# Altium PCB MEMS_Instrumentation.PcbDoc
Units mil, origin at the board's own origin, x right, y up, seen from the top; angles counter-clockwise.
Board outline 3759.84 x 2874.02 mil, 6 copper layers (Top Layer, GND, VCC+, VCC-, VExcite, Bottom Layer); 115 components, 110 nets, 526 pads, 54 vias.
Unrouted connection lines stored in the file: 6.
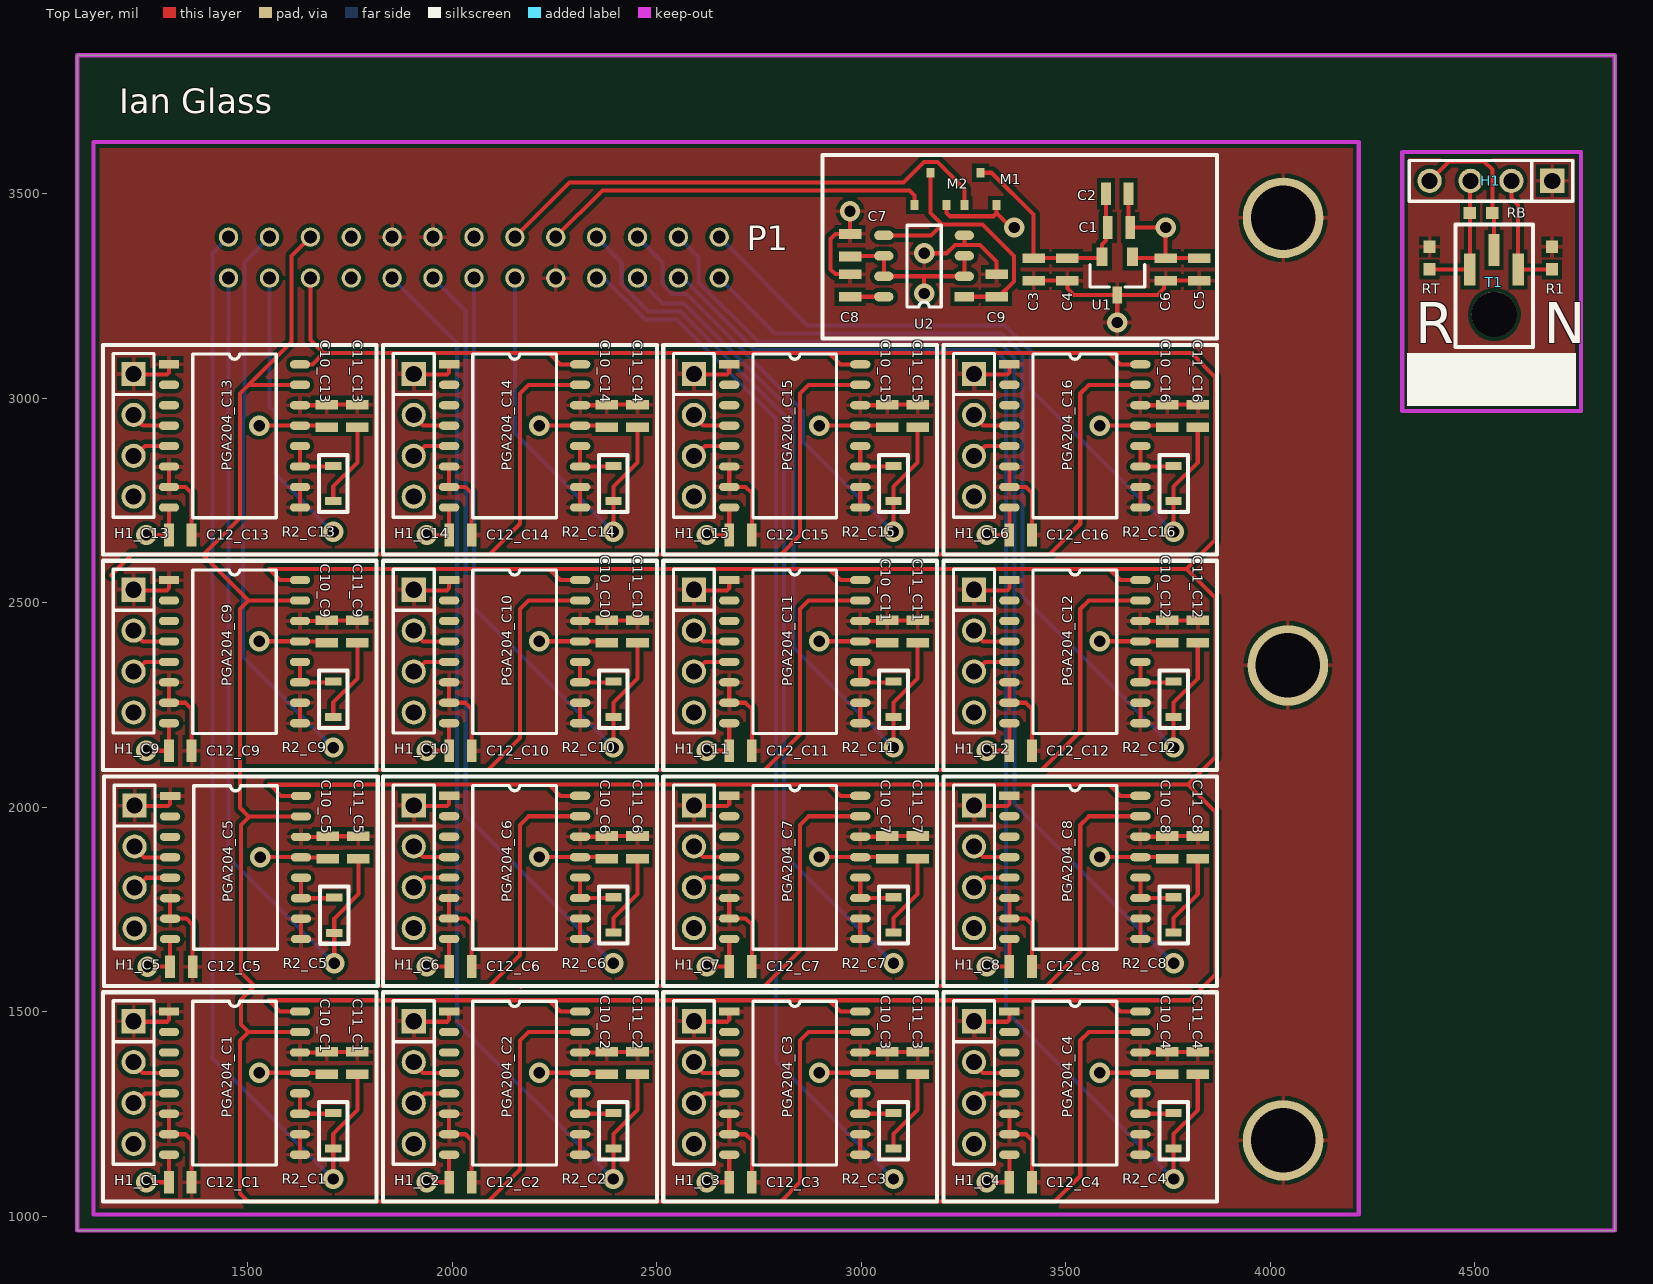
[diagram p0: Top Layer view]
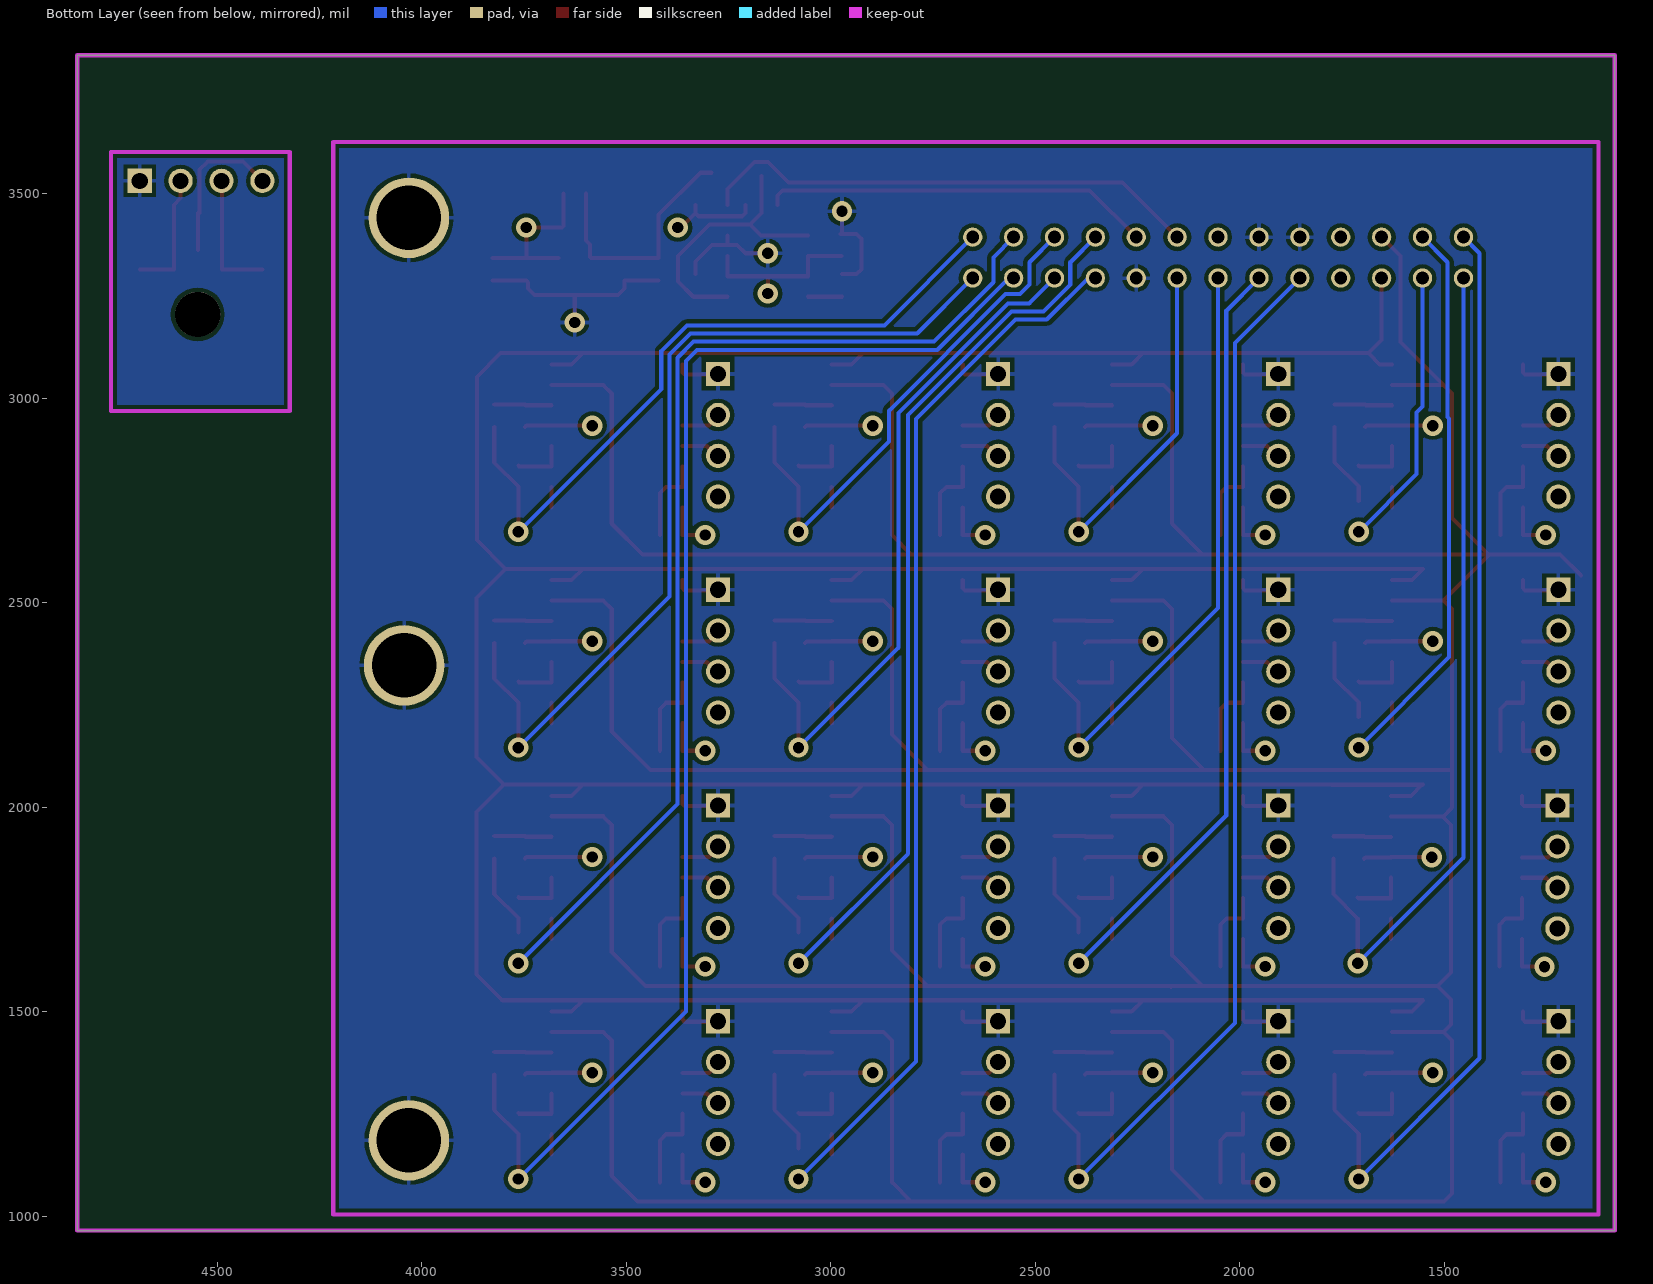
[diagram p1: Bottom Layer view, seen from below]
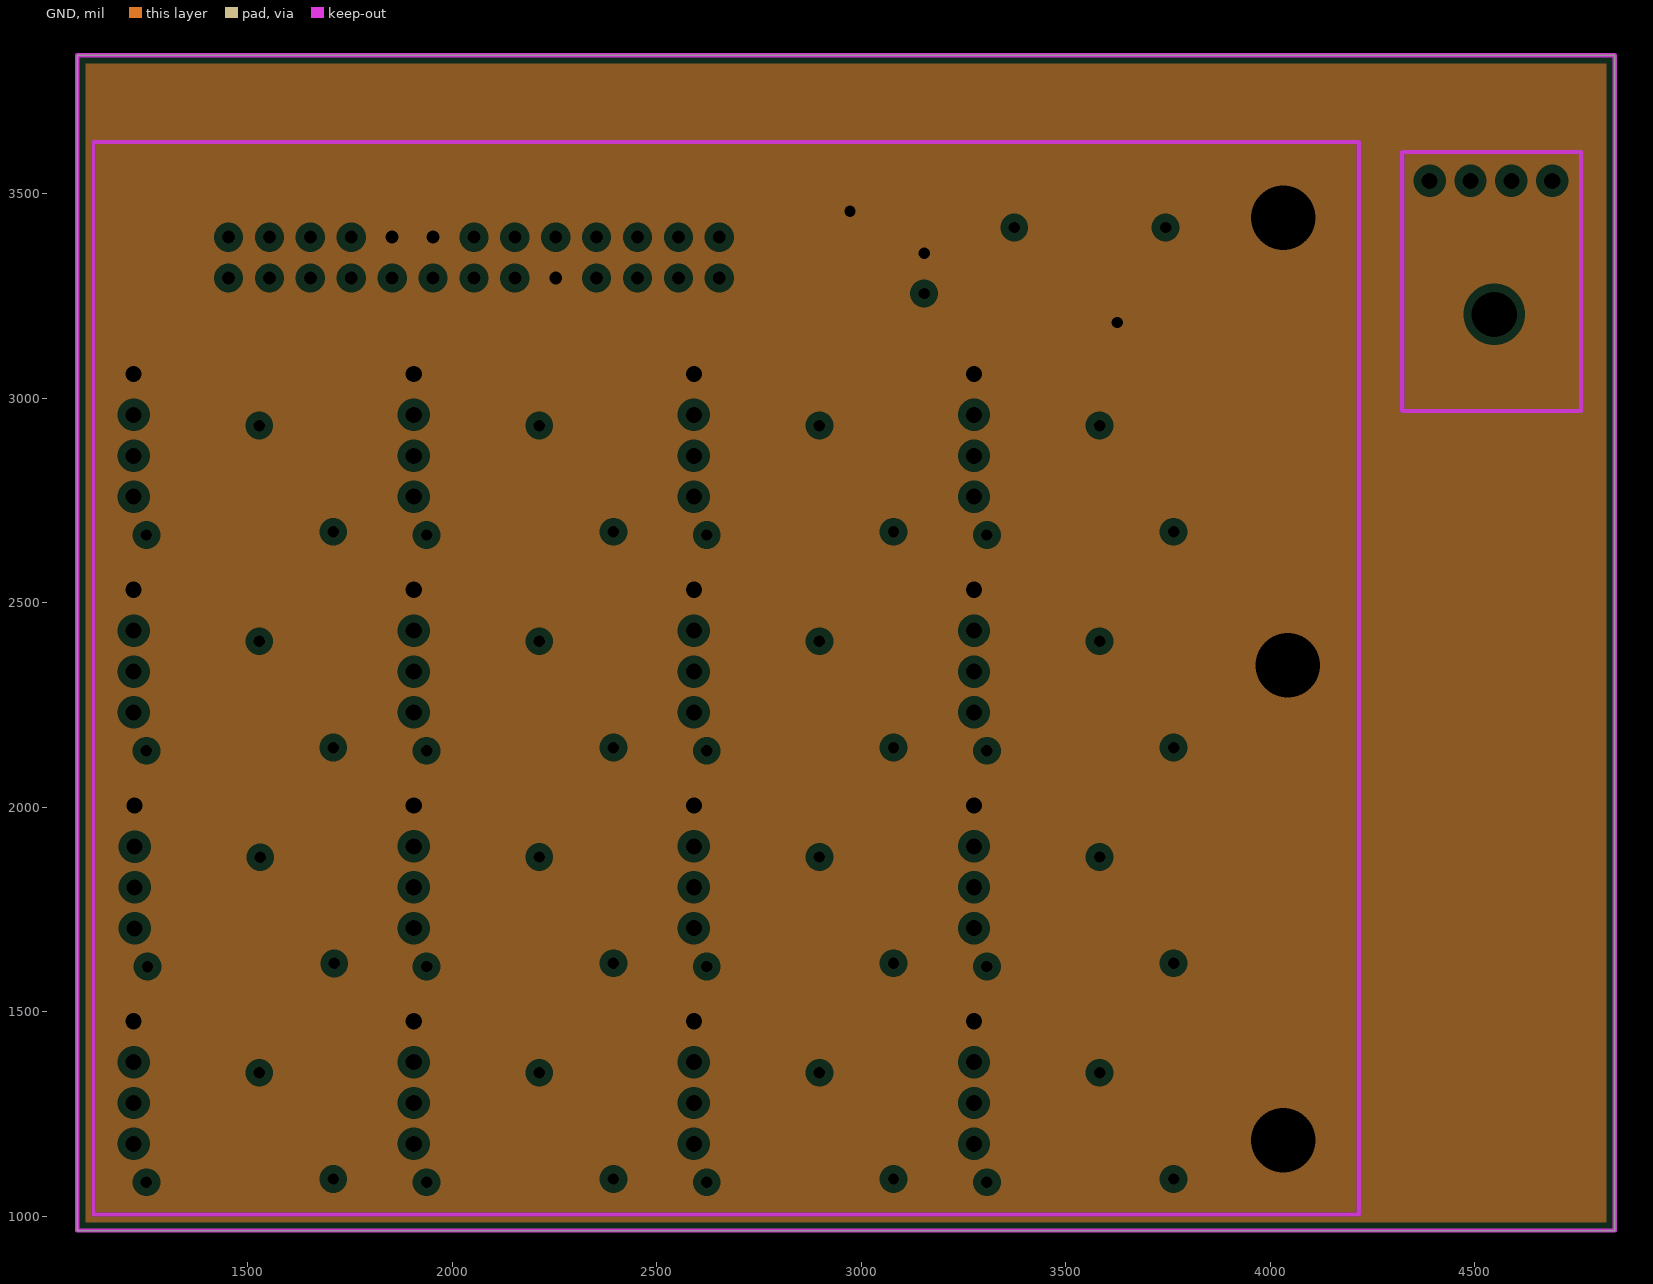
[diagram p2: GND, clearances drawn from the general rule]
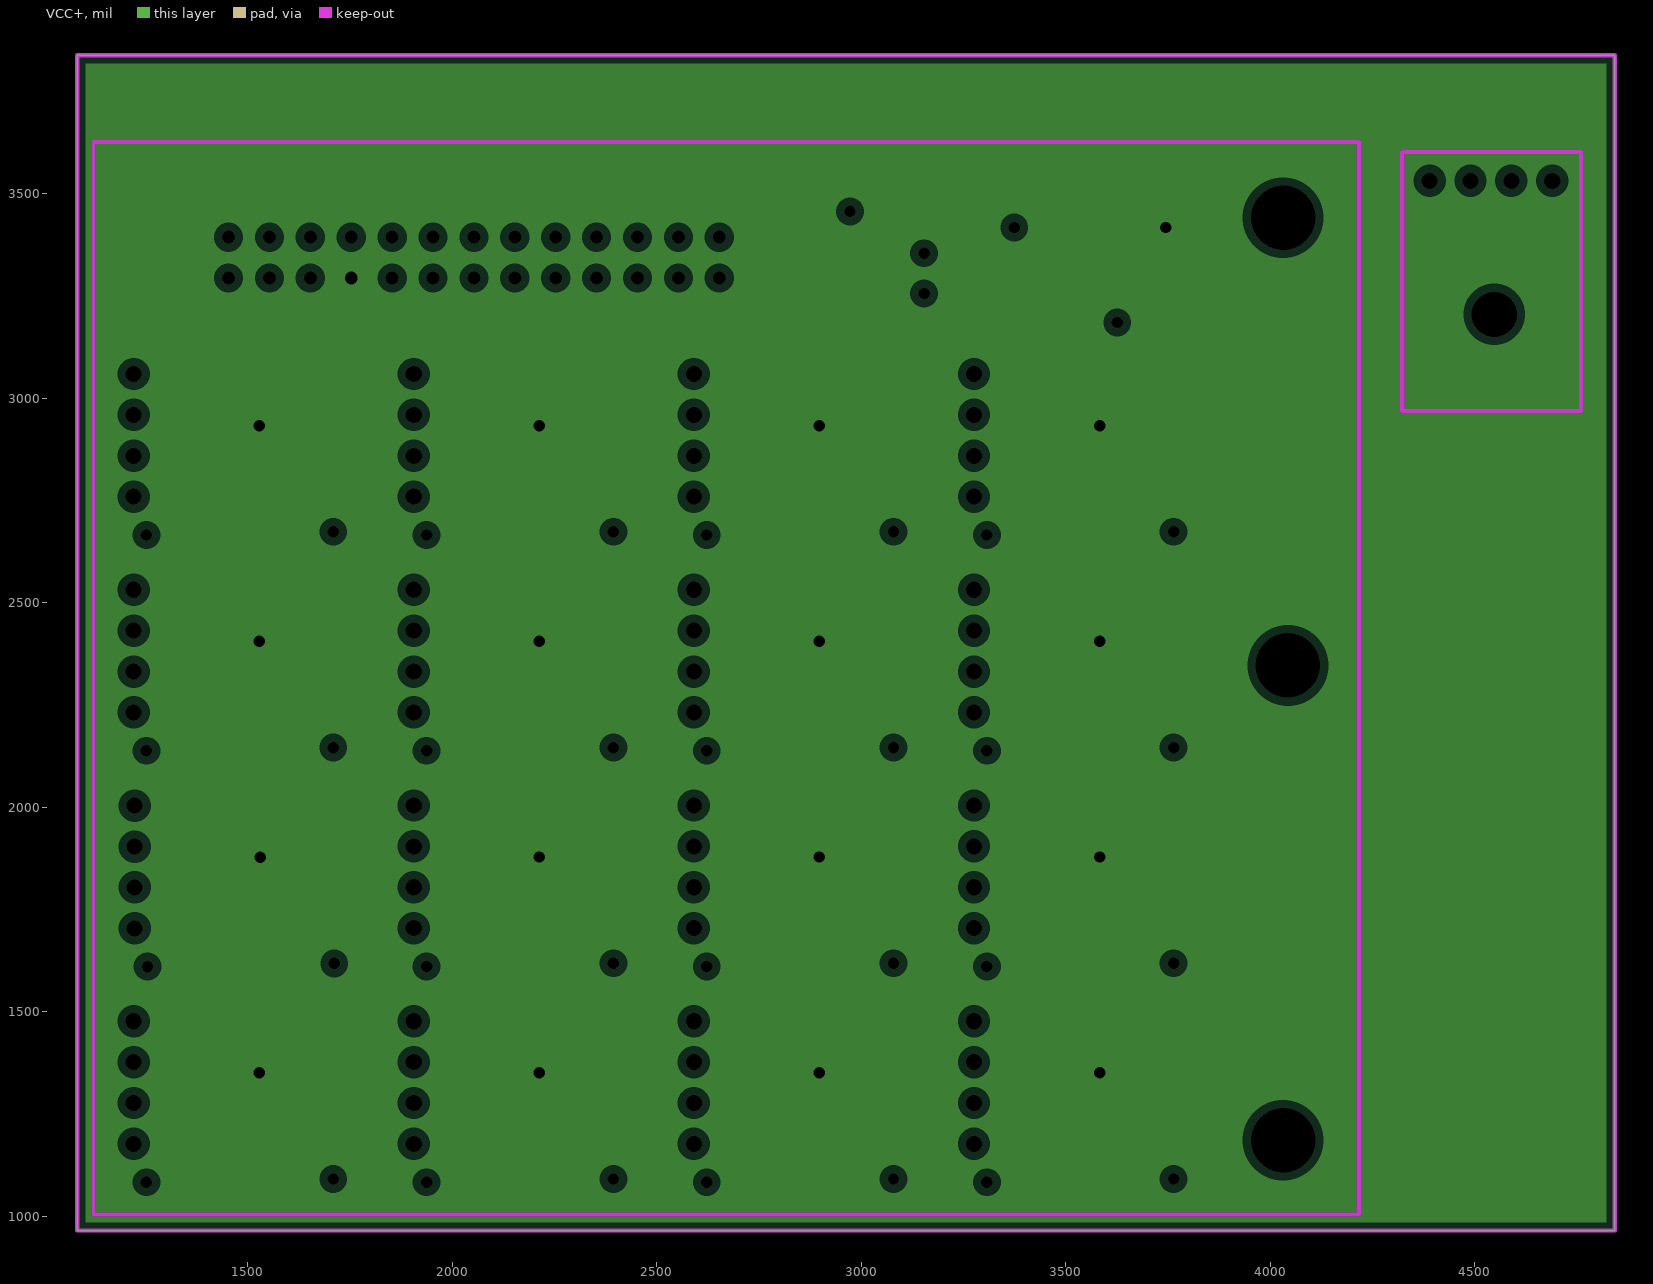
[diagram p3: VCC+, clearances drawn from the general rule]
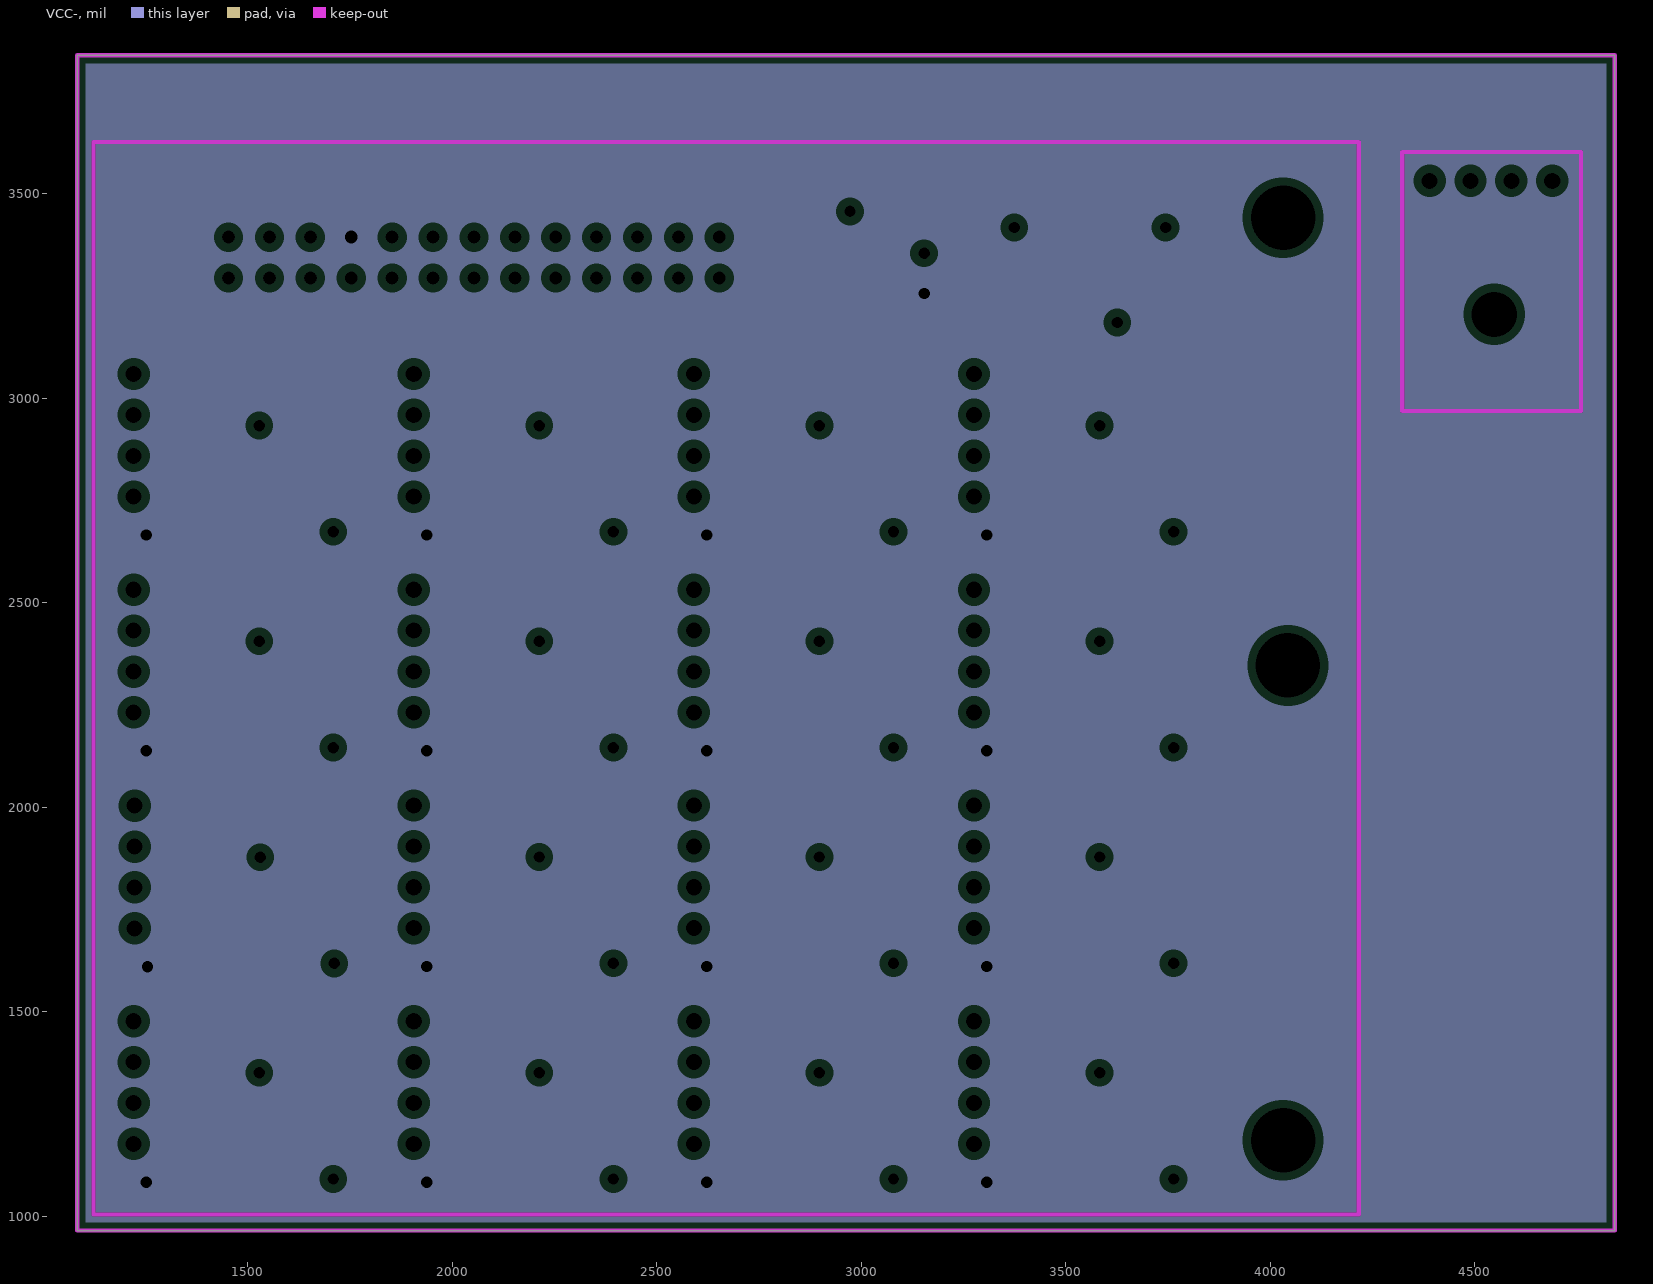
[diagram p4: VCC-, clearances drawn from the general rule]
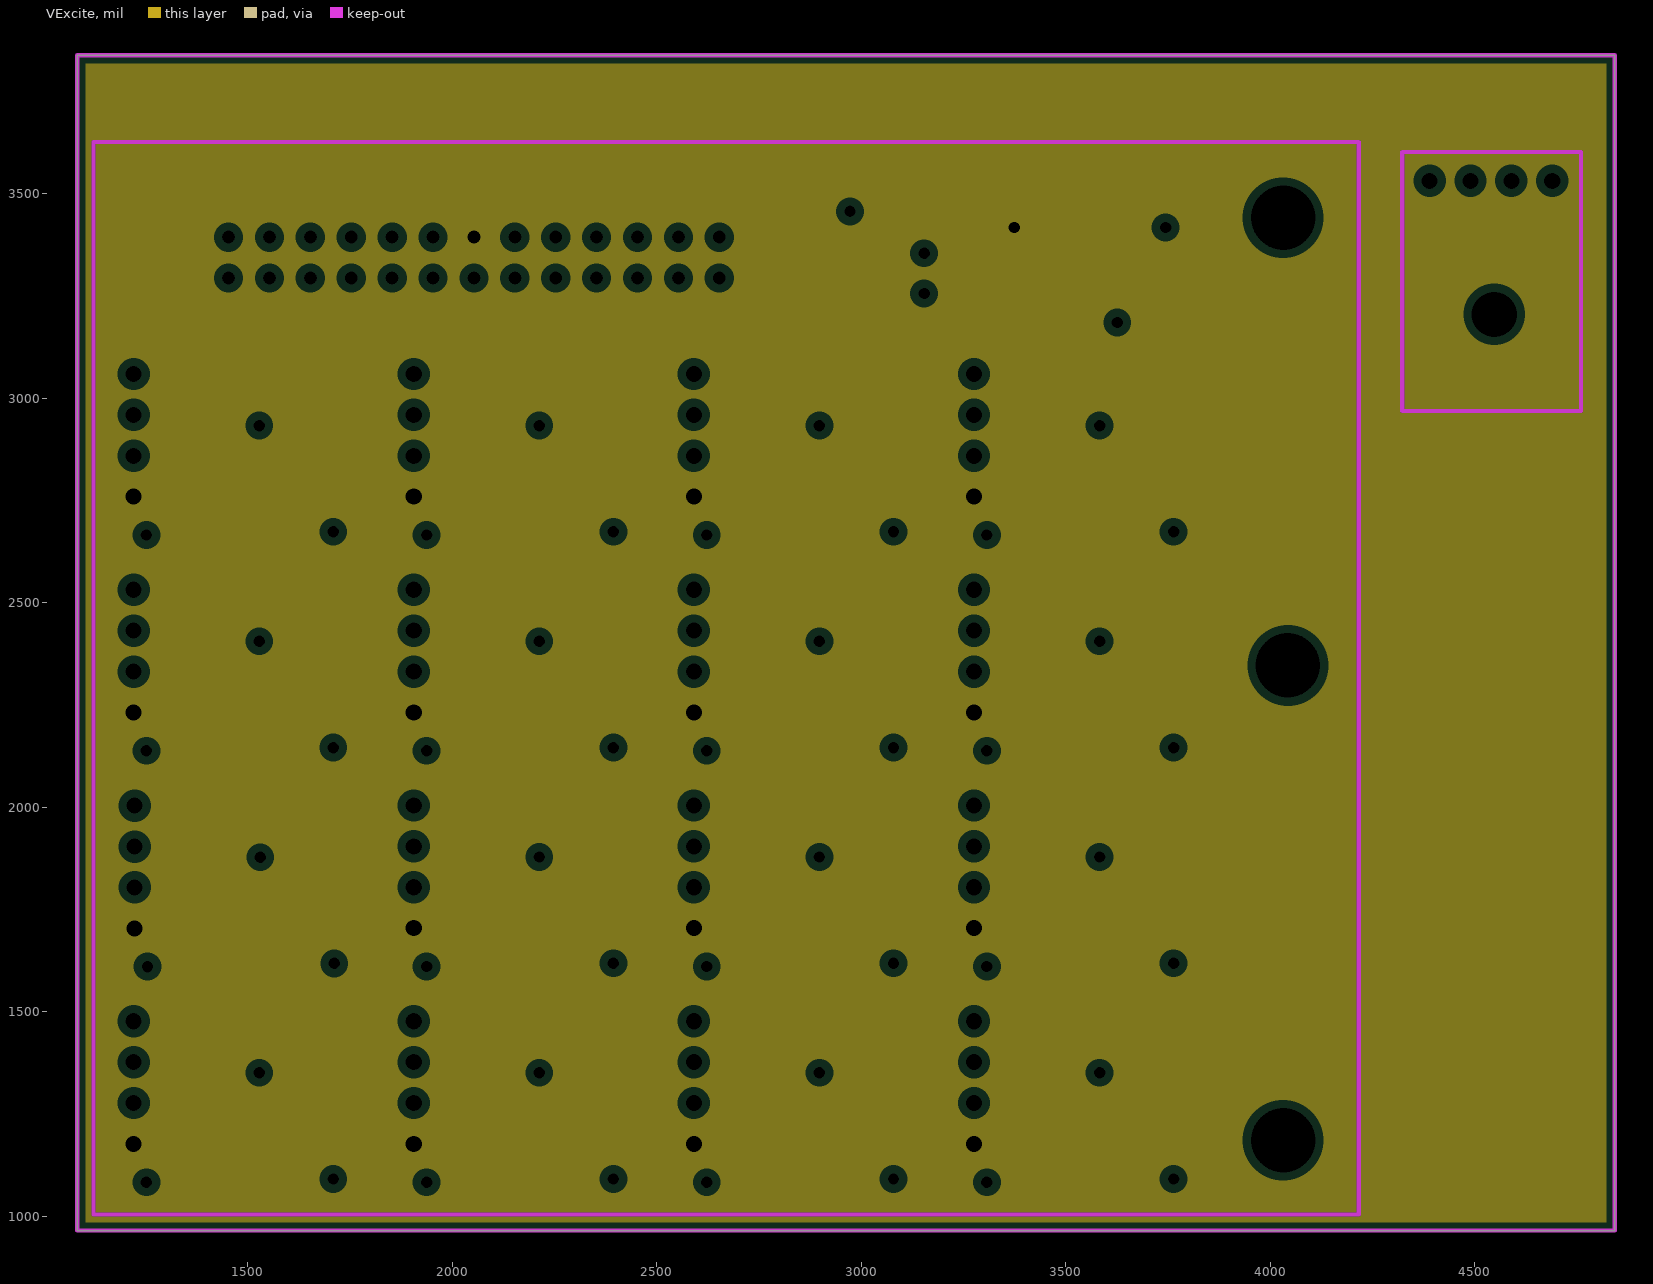
[diagram p5: VExcite, clearances drawn from the general rule]

## Layer stack, top to bottom
Top Layer: signal copper 1.4
Dielectric: prepreg 12.6, FR-4, Dk 4.8
GND: plane copper 1.4, net GND
Dielectric: core 12.6, FR-4, Dk 4.8
VCC+: plane copper 1.4, net VCC+
Dielectric: prepreg 12.6, FR-4, Dk 4.8
VCC-: plane copper 1.4, net VCC-
Dielectric: core 12.6, FR-4, Dk 4.8
VExcite: plane copper 1.4, net VEXCITE
Dielectric: prepreg 12.6, FR-4, Dk 4.8
Bottom Layer: signal copper 1.4

## Board outline
1082.68,964.57 1082.68,3838.58 4842.52,3838.58 4842.52,964.57

## Design rules (kind name [scope] priority, off if disabled: settings)
Clearance [All] p1: gap=10
PlaneClearance [All] p1: clearance=20
PlaneConnect [All] p1: planeconnectstyle=Relief reliefexpansion=20 reliefentries=4 reliefconductorwidth=10 reliefairgap=10
PolygonConnect [All] p1: connectstyle=Relief reliefconductorwidth=10 reliefentries=4 polygonreliefangle="90 Angle" airgapwidth=10
RoomDefinition "Stub Tester" [InComponentClass('Stub Tester')] p1: confinementstyle=ConfineIn formatcopy=TRUE lockcomponents=FALSE outline 3877.95,3137.8 2897.64,3137.8 2897.64,3602.36 3877.95,3602.36
RoomDefinition C11 [InComponentClass('C11')] p2: confinementstyle=ConfineIn formatcopy=TRUE lockcomponents=FALSE outline 2507.87,2610.24 3192.91,2610.24 3192.91,2082.68 2507.87,2082.68
RoomDefinition C3 [InComponentClass('C3')] p3: confinementstyle=ConfineIn formatcopy=TRUE lockcomponents=FALSE outline 2507.87,1555.12 3192.91,1555.12 3192.91,1027.56 2507.87,1027.56
RoomDefinition C16 [InComponentClass('C16')] p4: confinementstyle=ConfineIn formatcopy=TRUE lockcomponents=FALSE outline 3192.91,3137.8 3877.95,3137.8 3877.95,2610.24 3192.91,2610.24
RoomDefinition C15 [InComponentClass('C15')] p5: confinementstyle=ConfineIn formatcopy=TRUE lockcomponents=FALSE outline 2507.87,3137.8 3192.91,3137.8 3192.91,2610.24 2507.87,2610.24
RoomDefinition C14 [InComponentClass('C14')] p6: confinementstyle=ConfineIn formatcopy=TRUE lockcomponents=FALSE outline 1822.83,3137.8 2507.87,3137.8 2507.87,2610.24 1822.83,2610.24
RoomDefinition C13 [InComponentClass('C13')] p7: confinementstyle=ConfineIn formatcopy=TRUE lockcomponents=FALSE outline 1137.8,3137.8 1822.83,3137.8 1822.83,2610.24 1137.8,2610.24
RoomDefinition C12 [InComponentClass('C12')] p8: confinementstyle=ConfineIn formatcopy=TRUE lockcomponents=FALSE outline 3192.91,2610.24 3877.95,2610.24 3877.95,2082.68 3192.91,2082.68
RoomDefinition C10 [InComponentClass('C10')] p9: confinementstyle=ConfineIn formatcopy=TRUE lockcomponents=FALSE outline 1822.83,2610.24 2507.87,2610.24 2507.87,2082.68 1822.83,2082.68
RoomDefinition C2 [InComponentClass('C2')] p10: confinementstyle=ConfineIn formatcopy=TRUE lockcomponents=FALSE outline 1822.83,1555.12 2507.87,1555.12 2507.87,1027.56 1822.83,1027.56
RoomDefinition C9 [InComponentClass('C9')] p11: confinementstyle=ConfineIn formatcopy=TRUE lockcomponents=FALSE outline 1137.8,2610.24 1822.83,2610.24 1822.83,2082.68 1137.8,2082.68
RoomDefinition C8 [InComponentClass('C8')] p12: confinementstyle=ConfineIn formatcopy=TRUE lockcomponents=FALSE outline 3192.91,2082.68 3877.95,2082.68 3877.95,1555.12 3192.91,1555.12
RoomDefinition C7 [InComponentClass('C7')] p13: confinementstyle=ConfineIn formatcopy=TRUE lockcomponents=FALSE outline 2507.87,2082.68 3192.91,2082.68 3192.91,1555.12 2507.87,1555.12
RoomDefinition C6 [InComponentClass('C6')] p14: confinementstyle=ConfineIn formatcopy=TRUE lockcomponents=FALSE outline 1822.83,2082.68 2507.87,2082.68 2507.87,1555.12 1822.83,1555.12
RoomDefinition C5 [InComponentClass('C5')] p15: confinementstyle=ConfineIn formatcopy=TRUE lockcomponents=FALSE outline 1140.36,2082.28 1825.39,2082.28 1825.39,1554.73 1140.36,1554.73
RoomDefinition C4 [InComponentClass('C4')] p16: confinementstyle=ConfineIn formatcopy=TRUE lockcomponents=FALSE outline 3192.91,1555.12 3877.95,1555.12 3877.95,1027.56 3192.91,1027.56
RoomDefinition C1 [InComponentClass('C1')] p17: confinementstyle=ConfineIn formatcopy=TRUE lockcomponents=FALSE outline 1137.8,1555.12 1822.83,1555.12 1822.83,1027.56 1137.8,1027.56
RoutingVias [All] p1: holewidth=28 width=50 viastyle="Through Hole" minholewidth=28 minwidth=50 maxholewidth=28 maxwidth=50
SolderMaskExpansion [All] p1: expansion=4
Width [All] p1: maxlimit=10 minlimit=10 preferedwidth=10
26 further rules are at their usual default settings.

## Classes and differential pairs
channel class "LED Board": LED1 LED2 LED3 LED4 LED5 LED6 LED7 LED8 LED9 LED10 LED11 LED12 LED13 LED14 LED15 LED16
component class Commercial: H3 H4 H5
channel class Amplifier: Channel Channel2

## Components (designator, comment, footprint, x,y, rotation, side; value= is the part's Value field where it differs from the comment)
C1 "1nF" "C0603 1uF" 3629.92,3417.32 r0 top
C2 "100nF" "C0603 1uF" 3625.98,3500 r0 top
C3 "1nF" "C0603 1uF" 3421.26,3314.96 r90 top
C4 "100nF" "C0603 1uF" 3503.94,3314.96 r90 top
C5 "1uF" "C0603 1uF" 3826.77,3314.96 r90 top
C6 "10uF" "C0603 1uF" 3744.09,3314.96 r90 top
C7 "1uF" "C0603 1uF" 2972.44,3374.02 r270 top
C8 "0.015uF" "C0603 1uF" 2972.44,3275.59 r270 top
C9 "4.7uF" "C0603 1uF" 3330.71,3275.59 r270 top
C10_C1 "C0603 1uF" "C0603 1uF" 1692.91,1374.02 r270 top (schematic designator C10)
C10_C2 "C0603 1uF" "C0603 1uF" 2377.95,1374.02 r270 top (schematic designator C10)
C10_C3 "C0603 1uF" "C0603 1uF" 3062.99,1374.02 r270 top (schematic designator C10)
C10_C4 "C0603 1uF" "C0603 1uF" 3748.03,1374.02 r270 top (schematic designator C10)
C10_C5 "C0603 1uF" "C0603 1uF" 1695.47,1901.18 r270 top (schematic designator C10)
C10_C6 "C0603 1uF" "C0603 1uF" 2377.95,1901.58 r270 top (schematic designator C10)
C10_C7 "C0603 1uF" "C0603 1uF" 3062.99,1901.58 r270 top (schematic designator C10)
C10_C8 "C0603 1uF" "C0603 1uF" 3748.03,1901.58 r270 top (schematic designator C10)
C10_C9 "C0603 1uF" "C0603 1uF" 1692.91,2429.13 r270 top (schematic designator C10)
C10_C10 "C0603 1uF" "C0603 1uF" 2377.95,2429.13 r270 top (schematic designator C10)
C10_C11 "C0603 1uF" "C0603 1uF" 3062.99,2429.13 r270 top (schematic designator C10)
C10_C12 "C0603 1uF" "C0603 1uF" 3748.03,2429.13 r270 top (schematic designator C10)
C10_C13 "C0603 1uF" "C0603 1uF" 1692.91,2956.69 r270 top (schematic designator C10)
C10_C14 "C0603 1uF" "C0603 1uF" 2377.95,2956.69 r270 top (schematic designator C10)
C10_C15 "C0603 1uF" "C0603 1uF" 3062.99,2956.69 r270 top (schematic designator C10)
C10_C16 "C0603 1uF" "C0603 1uF" 3748.03,2956.69 r270 top (schematic designator C10)
C11_C1 "1uF" "C0603 1uF" 1767.72,1374.02 r270 top (schematic designator C11)
C11_C2 "1uF" "C0603 1uF" 2452.76,1374.02 r270 top (schematic designator C11)
C11_C3 "1uF" "C0603 1uF" 3137.79,1374.02 r270 top (schematic designator C11)
C11_C4 "1uF" "C0603 1uF" 3822.83,1374.02 r270 top (schematic designator C11)
C11_C5 "1uF" "C0603 1uF" 1770.28,1901.18 r270 top (schematic designator C11)
C11_C6 "1uF" "C0603 1uF" 2452.76,1901.58 r270 top (schematic designator C11)
C11_C7 "1uF" "C0603 1uF" 3137.79,1901.58 r270 top (schematic designator C11)
C11_C8 "1uF" "C0603 1uF" 3822.83,1901.58 r270 top (schematic designator C11)
C11_C9 "1uF" "C0603 1uF" 1767.72,2429.13 r270 top (schematic designator C11)
C11_C10 "1uF" "C0603 1uF" 2452.76,2429.13 r270 top (schematic designator C11)
C11_C11 "1uF" "C0603 1uF" 3137.79,2429.13 r270 top (schematic designator C11)
C11_C12 "1uF" "C0603 1uF" 3822.83,2429.13 r270 top (schematic designator C11)
C11_C13 "1uF" "C0603 1uF" 1767.72,2956.69 r270 top (schematic designator C11)
C11_C14 "1uF" "C0603 1uF" 2452.76,2956.69 r270 top (schematic designator C11)
C11_C15 "1uF" "C0603 1uF" 3137.79,2956.69 r270 top (schematic designator C11)
C11_C16 "1uF" "C0603 1uF" 3822.83,2956.69 r270 top (schematic designator C11)
C12_C1 "C0603 1uF" "C0603 1uF" 1334.65,1082.68 r180 top (schematic designator C12)
C12_C2 "C0603 1uF" "C0603 1uF" 2019.68,1082.68 r180 top (schematic designator C12)
C12_C3 "C0603 1uF" "C0603 1uF" 2704.72,1082.68 r180 top (schematic designator C12)
C12_C4 "C0603 1uF" "C0603 1uF" 3389.76,1082.68 r180 top (schematic designator C12)
C12_C5 "C0603 1uF" "C0603 1uF" 1337.2,1609.84 r180 top (schematic designator C12)
C12_C6 "C0603 1uF" "C0603 1uF" 2019.68,1610.24 r180 top (schematic designator C12)
C12_C7 "C0603 1uF" "C0603 1uF" 2704.72,1610.24 r180 top (schematic designator C12)
C12_C8 "C0603 1uF" "C0603 1uF" 3389.76,1610.24 r180 top (schematic designator C12)
C12_C9 "C0603 1uF" "C0603 1uF" 1334.64,2137.8 r180 top (schematic designator C12)
C12_C10 "C0603 1uF" "C0603 1uF" 2019.68,2137.8 r180 top (schematic designator C12)
C12_C11 "C0603 1uF" "C0603 1uF" 2704.72,2137.8 r180 top (schematic designator C12)
C12_C12 "C0603 1uF" "C0603 1uF" 3389.76,2137.8 r180 top (schematic designator C12)
C12_C13 "C0603 1uF" "C0603 1uF" 1334.64,2665.35 r180 top (schematic designator C12)
C12_C14 "C0603 1uF" "C0603 1uF" 2019.68,2665.35 r180 top (schematic designator C12)
C12_C15 "C0603 1uF" "C0603 1uF" 2704.72,2665.35 r180 top (schematic designator C12)
C12_C16 "C0603 1uF" "C0603 1uF" 3389.76,2665.35 r180 top (schematic designator C12)
H1 "Header1x4" Header1x4 4689.76,3531.5 r180 top
H1_C1 "Die Stub H" Header1x4 1220.47,1476.38 r270 top (schematic designator H1)
H1_C2 "Die Stub H" Header1x4 1905.51,1476.38 r270 top (schematic designator H1)
H1_C3 "Die Stub H" Header1x4 2590.55,1476.38 r270 top (schematic designator H1)
H1_C4 "Die Stub H" Header1x4 3275.59,1476.38 r270 top (schematic designator H1)
H1_C5 "Die Stub H" Header1x4 1223.03,2003.54 r270 top (schematic designator H1)
H1_C6 "Die Stub H" Header1x4 1905.51,2003.94 r270 top (schematic designator H1)
H1_C7 "Die Stub H" Header1x4 2590.55,2003.94 r270 top (schematic designator H1)
H1_C8 "Die Stub H" Header1x4 3275.59,2003.94 r270 top (schematic designator H1)
H1_C9 "Die Stub H" Header1x4 1220.47,2531.5 r270 top (schematic designator H1)
H1_C10 "Die Stub H" Header1x4 1905.51,2531.5 r270 top (schematic designator H1)
H1_C11 "Die Stub H" Header1x4 2590.55,2531.5 r270 top (schematic designator H1)
H1_C12 "Die Stub H" Header1x4 3275.59,2531.5 r270 top (schematic designator H1)
H1_C13 "Die Stub H" Header1x4 1220.47,3059.06 r270 top (schematic designator H1)
H1_C14 "Die Stub H" Header1x4 1905.51,3059.06 r270 top (schematic designator H1)
H1_C15 "Die Stub H" Header1x4 2590.55,3059.06 r270 top (schematic designator H1)
H1_C16 "Die Stub H" Header1x4 3275.59,3059.06 r270 top (schematic designator H1)
M1 "Si2304BDS" Si2304BDS 3291.34,3551.18 r0 top
M2 "Si2304BDS" Si2304BDS 3169.29,3551.18 r0 top
P1 "XG4C26" XG4C26 1452.76,3393.7 r0 top
PGA204_C1 "PGA204" PGA204 1307.09,1500 r0 top (schematic designator PGA204)
PGA204_C2 "PGA204" PGA204 1992.13,1500 r0 top (schematic designator PGA204)
PGA204_C3 "PGA204" PGA204 2677.16,1500 r0 top (schematic designator PGA204)
PGA204_C4 "PGA204" PGA204 3362.2,1500 r0 top (schematic designator PGA204)
PGA204_C5 "PGA204" PGA204 1309.65,2027.17 r0 top (schematic designator PGA204)
PGA204_C6 "PGA204" PGA204 1992.13,2027.56 r0 top (schematic designator PGA204)
PGA204_C7 "PGA204" PGA204 2677.16,2027.56 r0 top (schematic designator PGA204)
PGA204_C8 "PGA204" PGA204 3362.2,2027.56 r0 top (schematic designator PGA204)
PGA204_C9 "PGA204" PGA204 1307.09,2555.12 r0 top (schematic designator PGA204)
PGA204_C10 "PGA204" PGA204 1992.13,2555.12 r0 top (schematic designator PGA204)
PGA204_C11 "PGA204" PGA204 2677.16,2555.12 r0 top (schematic designator PGA204)
PGA204_C12 "PGA204" PGA204 3362.2,2555.12 r0 top (schematic designator PGA204)
PGA204_C13 "PGA204" PGA204 1307.09,3082.68 r0 top (schematic designator PGA204)
PGA204_C14 "PGA204" PGA204 1992.13,3082.68 r0 top (schematic designator PGA204)
PGA204_C15 "PGA204" PGA204 2677.16,3082.68 r0 top (schematic designator PGA204)
PGA204_C16 "PGA204" PGA204 3362.2,3082.68 r0 top (schematic designator PGA204)
R1 "0603 MINI" "0603 MINI" 4688.98,3370.08 r270 top
R2_C1 "1k" "RT0603 330k" 1708.66,1208.66 r90 top (schematic designator R2)
R2_C2 "1k" "RT0603 330k" 2393.7,1208.66 r90 top (schematic designator R2)
R2_C3 "1k" "RT0603 330k" 3078.74,1208.66 r90 top (schematic designator R2)
R2_C4 "1k" "RT0603 330k" 3763.78,1208.66 r90 top (schematic designator R2)
R2_C5 "1k" "RT0603 330k" 1711.22,1735.83 r90 top (schematic designator R2)
R2_C6 "1k" "RT0603 330k" 2393.7,1736.22 r90 top (schematic designator R2)
R2_C7 "1k" "RT0603 330k" 3078.74,1736.22 r90 top (schematic designator R2)
R2_C8 "1k" "RT0603 330k" 3763.78,1736.22 r90 top (schematic designator R2)
R2_C9 "1k" "RT0603 330k" 1708.66,2263.78 r90 top (schematic designator R2)
R2_C10 "1k" "RT0603 330k" 2393.7,2263.78 r90 top (schematic designator R2)
R2_C11 "1k" "RT0603 330k" 3078.74,2263.78 r90 top (schematic designator R2)
R2_C12 "1k" "RT0603 330k" 3763.78,2263.78 r90 top (schematic designator R2)
R2_C13 "1k" "RT0603 330k" 1708.66,2791.34 r90 top (schematic designator R2)
R2_C14 "1k" "RT0603 330k" 2393.7,2791.34 r90 top (schematic designator R2)
R2_C15 "1k" "RT0603 330k" 3078.74,2791.34 r90 top (schematic designator R2)
R2_C16 "1k" "RT0603 330k" 3763.78,2791.34 r90 top (schematic designator R2)
RB "0603 MINI" "0603 MINI" 4488.19,3452.76 r0 top
RT "0603 MINI" "0603 MINI" 4389.76,3370.08 r270 top
T1 "Transducer" Transducer 4507.87,3314.97 r0 top
U1 "REF3012" REF3012 3625.98,3251.97 r180 top
U2 "UCC384DP" UCC384DP 3251.97,3248.03 r180 top

## Footprints (in the part's own frame and the unit in brackets; to place one, negate y for a bottom-side part, rotate by r counter-clockwise, add the part's x,y. Pads: shape width x height; smd on the part's side, far side on the other; paste and mask are expansions set on the pad)
"0603 MINI" [mil]
  rect 30x30 smd: 0(0,0) 1(55,0)
"C0603 1uF" [mm]
  rect 0.6x1.4 smd: 0(-0.7,0) 1(0.7,0)
Header1x4 [mm]
  rect 1.5x1.5 hole 1: 0(0,0)
  round 1.5 hole 1: 1(2.54,0) 2(5.08,0) 3(7.62,0)
  silkscreen extent -1.27,-1.27 8.89,1.27
PGA204 [mm]
  rect 1.27x0.51 smd: 1(0,0)
  oval 1.27x0.51 smd: 2(0,-1.27) 3(0,-2.54) 4(0,-3.81) 5(0,-5.08) 6(0,-6.35) 7(0,-7.62) 8(0,-8.89) 9(8.135,-8.89) 10(8.135,-7.62) 11(8.135,-6.35) 12(8.135,-5.08) 13(8.135,-3.81) 14(8.135,-2.54) 15(8.135,-1.27) 16(8.135,0)
  silkscreen extent 1.47,-9.53 6.66,0.64
REF3012 [mm]
  rect 0.7x1.15 smd: 1(-0.95,-2.37) 2(0.95,-2.37)
  rect 0.6x1.05 smd: 3(0,0)
  silkscreen extent -1.7,-1.9 1.7,-0.5
"RT0603 330k" [mm]
  rect 0.5x1 smd: 0(-1.1,0) 1(1.1,0)
  silkscreen extent -1.78,-0.89 1.78,0.89
Si2304BDS [mm]
  rect 0.5x0.6 smd: 1(-1,-2) 2(1,-2) 3(0,0)
Transducer [mm]
  rect 0.7x2 smd: 0(-0.5,0) 1(1,1.2) 2(2.5,0)
  round 2.8 hole 2.8: 5(1.016,-2.794)
  silkscreen extent -1.4,-4.83 3.43,2.79
UCC384DP [mm]
  rect 1.2x0.6 smd: 1(0,0)
  oval 1.2x0.6 smd: 2(0,-1.27) 3(0,-2.54) 4(0,-3.81) 5(5,-3.81) 6(5,-2.54) 7(5,-1.27) 8(5,0)
  silkscreen extent 1.44,-4.45 3.57,0.64
XG4C26 [mm]
  round 1.2 hole 0.8: 1(0,0) 2(0,-2.54) 3(2.54,0) 4(2.54,-2.54) 5(5.08,0) 6(5.08,-2.54) 7(7.62,0) 8(7.62,-2.54) 9(10.16,0) 10(10.16,-2.54) 11(12.7,0) 12(12.7,-2.54) 13(15.24,0) 14(15.24,-2.54) 15(17.78,0) 16(17.78,-2.54) 17(20.32,0) 18(20.32,-2.54) 19(22.86,0) 20(22.86,-2.54) 21(25.4,0) 22(25.4,-2.54) 23(27.94,0) 24(27.94,-2.54) 25(30.48,0) 26(30.48,-2.54)

## Part data
C1 C2 C3 C4 C5 C6 C7 C8 C9 C11_C1 C11_C2 C11_C3 C11_C4 C11_C5 C11_C6 C11_C7 C11_C8 C11_C9 C11_C10 C11_C11 C11_C12 C11_C13 C11_C14 C11_C15 C11_C16: library part "C0603 1uF"
H1_C1 H1_C2 H1_C3 H1_C4 H1_C5 H1_C6 H1_C7 H1_C8 H1_C9 H1_C10 H1_C11 H1_C12 H1_C13 H1_C14 H1_C15 H1_C16: library part Header1x4
R2_C1 R2_C2 R2_C3 R2_C4 R2_C5 R2_C6 R2_C7 R2_C8 R2_C9 R2_C10 R2_C11 R2_C12 R2_C13 R2_C14 R2_C15 R2_C16: library part "RT0603 330k"

## Free pads (board coordinates)
  round 196.85 hole 157.48: 0(4031.5,1185.04) 0(4031.5,3440.94) 0(4043.31,2346.46)

## Via types
v1: diameter 50, hole 28, Top Layer to Bottom Layer, 54 vias

## Nets (pads, with @x,y where several pads share a name; then routed paths per layer and width w, separated by ;. In a path a pad name is that pad's centre, name@x,y a point inside that pad or via, vN(x,y) a via of type N, cw(c..) or ccw(c..) an arc to the next point about the centre after c; other vN are vias at no path point)
1.25V: C1.0 C2.0 C3.1 C4.1 M1.3 U1.2 | length 605.9
  Top Layer w10: M1.3 3318.9,3551.18 3421.26,3448.82 C3.1 C4.1 3585.83,3342.52 U1.2 3588.58,3375.98 3598.43,3385.83 C2.0
-1.25V: C9.1 M2.3 U2.1 U2.5 | length 690.6
  Top Layer w10: U2.5 3170.39,3398.03 3197.2,3424.84 ; M2.3@3169.29,3543.31 3169.29,3452.76 3197.2,3424.84 ; U2.1 C9.1 3336.17,3248.03 3373.27,3285.13 3373.27,3347.93 3296.35,3424.84 3229.05,3424.84 3197.2,3424.84
A0: P1.5 PGA204_C1.15 PGA204_C2.15 PGA204_C3.15 PGA204_C4.15 PGA204_C5.15 PGA204_C6.15 PGA204_C7.15 PGA204_C8.15 PGA204_C9.15 PGA204_C10.15 PGA204_C11.15 PGA204_C12.15 PGA204_C13.15 PGA204_C14.15 PGA204_C15.15 PGA204_C16.15 | length 18249.2
  Top Layer w10: 1165.35,2566.93 1216.54,2618.11 1391.34,2618.11 ; 1480.32,2090.55 2086.61,2090.55 ; PGA204_C1.15 1501.18,1450 ; PGA204_C9.15 1501.18,2505.12 ; PGA204_C13.15 1501.18,3032.68 ; PGA204_C5.15 1503.74,1977.17 ; P1.5 1606.3,3347.24 1606.3,3137.8 1501.18,3032.68 ; 2167.72,1560.63 2165.35,1562.99 ; PGA204_C2.15 2186.22,1450 2165.35,1429.13 2165.35,1114.17 2086.61,1035.43 ; PGA204_C6.15 2186.22,1977.56 2165.35,1956.69 2165.35,1637.8 2090.55,1562.99 ; PGA204_C10.15 2186.22,2505.12 2165.35,2484.25 2165.35,2169.29 2086.61,2090.55 ; PGA204_C14.15 2186.22,3032.68 2165.35,3011.81 2165.35,2692.91 2090.55,2618.11 ; PGA204_C3.15 2871.26,1450 2850.39,1429.13 2850.39,1082.68 2803.15,1035.43 ; PGA204_C7.15 2871.26,1977.56 2850.39,1956.69 2850.39,1649.61 2763.78,1562.99 ; PGA204_C11.15 2871.26,2505.12 2850.39,2484.25 2850.39,2177.17 2763.78,2090.55 ; PGA204_C15.15 2871.26,3032.68 2850.39,3011.81 2850.39,2665.35 2803.15,2618.11 ; PGA204_C4.15 3556.3,1450 3535.43,1429.13 3535.43,1098.43 3472.44,1035.43 2803.15,1035.43 ; PGA204_C8.15 3556.3,1977.56 3535.43,1956.69 3535.43,1645.67 3452.76,1562.99 2763.78,1562.99 ; PGA204_C12.15 3556.3,2505.12 3535.43,2484.25 3535.43,2185.04 3440.94,2090.55 2763.78,2090.55 ; PGA204_C16.15 3556.3,3032.68 3535.43,3011.81 3535.43,2692.91 3460.63,2618.11 2803.15,2618.11 ; 1391.34,2618.11 1389.76,2616.53 1501.18,2505.12 ; 1391.34,2618.11 1480.32,2707.09 1480.32,3011.81 1501.18,3032.68 ; 1391.34,2618.11 1480.32,2618.11 2090.55,2618.11 ; 1501.18,1450 1480.32,1429.13 1480.32,1055.12 1500,1035.43 2086.61,1035.43 ; 1501.18,1450 1482.68,1468.5 1482.68,1529.92 1515.75,1562.99 ; 1501.18,2505.12 1480.32,2484.25 1480.32,1998.42 1501.57,1977.17 1503.74,1977.17 ; 1503.74,1977.17 1482.87,1956.3 1482.87,1595.87 1515.75,1562.99 ; 1515.75,1562.99 2090.55,1562.99 ; 2086.61,1035.43 2803.15,1035.43 ; 2086.61,2090.55 2763.78,2090.55 ; 2090.55,1562.99 2165.35,1562.99 ; 2090.55,2618.11 2803.15,2618.11 ; 2165.35,1562.99 2763.78,1562.99
A1: P1.6 PGA204_C1.16 PGA204_C2.16 PGA204_C3.16 PGA204_C4.16 PGA204_C5.16 PGA204_C6.16 PGA204_C7.16 PGA204_C8.16 PGA204_C9.16 PGA204_C10.16 PGA204_C11.16 PGA204_C12.16 PGA204_C13.16 PGA204_C14.16 PGA204_C15.16 PGA204_C16.16 | length 12838.4
  Top Layer w10: 1551.18,2055.12 2236.22,2055.12 ; PGA204_C1.16 1578.74,1500 1551.18,1527.56 2236.22,1527.56 ; PGA204_C9.16 1578.74,2555.12 1551.18,2582.68 3606.3,2582.68 ; PGA204_C13.16 1657.48,3082.68 1685.04,3110.24 ; PGA204_C5.16 1581.3,2027.17 1553.74,2054.72 1774.21,2054.72 ; P1.6 1652.76,3142.52 1685.04,3110.24 ; 2236.22,3110.24 2263.78,3082.68 PGA204_C14.16 ; PGA204_C2.16 2263.78,1500 2236.22,1527.56 ; PGA204_C6.16 2263.78,2027.56 2236.22,2055.12 ; PGA204_C10.16 2263.78,2555.12 2236.22,2582.68 2460.63,2582.68 ; 2921.26,2582.68 2948.82,2555.12 PGA204_C11.16 ; PGA204_C3.16 2948.82,1500 2921.26,1527.56 ; PGA204_C7.16 2948.82,2027.56 2921.26,2055.12 ; PGA204_C15.16 2948.82,3082.68 2921.26,3110.24 3122.05,3110.24 ; PGA204_C4.16 3633.86,1500 3606.3,1527.56 ; PGA204_C8.16 3633.86,2027.56 3606.3,2055.12 ; PGA204_C12.16 3633.86,2555.12 3606.3,2582.68 ; PGA204_C16.16 3633.86,3082.68 3606.3,3110.24 ; 1685.04,3110.24 3606.3,3110.24 ; 2236.22,1527.56 2921.26,1527.56 ; 2236.22,2055.12 2921.26,2055.12 ; 2921.26,1527.56 3606.3,1527.56 ; 2921.26,2055.12 3606.3,2055.12 ; 3606.3,1527.56 3803.15,1527.56 3866.14,1590.55 3866.14,1988.19 3799.21,2055.12 ; 3606.3,2055.12 3799.21,2055.12 ; 3606.3,2582.68 3795.28,2582.68 ; 3606.3,3110.24 3807.09,3110.24 3865.39,3051.93 3865.39,2652.79 3795.28,2582.68 ; 3795.28,2582.68 3866.14,2511.81 3866.14,2122.05 3799.21,2055.12
CONT1: M1.1 P1.15 | length 1242.3
  Top Layer w10: P1.15 2286.93,3527.87 3103.12,3527.87 3153.24,3577.99 3185.79,3577.99 3251.97,3511.81 M1.1
CONT2: M2.1 P1.17 | length 952.6
  Top Layer w10: P1.17 2366.93,3507.87 3117.48,3507.87 3129.92,3495.43 M2.1
"CONT IR": 
"CONT RED": 
CS1: 
CS2: 
CS3: 
CS4: 
CS5: 
CS6: 
CS7: 
CS8: 
CS9: 
CS10: 
CS11: 
CS12: 
CS13: 
CS14: 
CS15: 
CS16: 
CS17: 
CS18: 
CS19: 
CS20: 
GND: C3.0 C4.0 C5.0 C6.0 C7.0 C8.0 C9.0 C10_C1.0 C10_C2.0 C10_C3.0 C10_C4.0 C10_C5.0 C10_C6.0 C10_C7.0 C10_C8.0 C10_C9.0 C10_C10.0 C10_C11.0 C10_C12.0 C10_C13.0 C10_C14.0 C10_C15.0 C10_C16.0 C11_C1.0 C11_C2.0 C11_C3.0 C11_C4.0 C11_C5.0 C11_C6.0 C11_C7.0 C11_C8.0 C11_C9.0 C11_C10.0 C11_C11.0 C11_C12.0 C11_C13.0 C11_C14.0 C11_C15.0 C11_C16.0 C12_C1.0 C12_C2.0 C12_C3.0 C12_C4.0 C12_C5.0 C12_C6.0 C12_C7.0 C12_C8.0 C12_C9.0 C12_C10.0 C12_C11.0 C12_C12.0 C12_C13.0 C12_C14.0 C12_C15.0 C12_C16.0 H1_C1.0 H1_C2.0 H1_C3.0 H1_C4.0 H1_C5.0 H1_C6.0 H1_C7.0 H1_C8.0 H1_C9.0 H1_C10.0 H1_C11.0 H1_C12.0 H1_C13.0 H1_C14.0 H1_C15.0 H1_C16.0 P1.9 P1.11 P1.18 pad.0 PGA204_C1.1 PGA204_C1.6 PGA204_C1.7 PGA204_C1.9 PGA204_C1.10 PGA204_C1.14 PGA204_C2.1 PGA204_C2.6 PGA204_C2.7 PGA204_C2.9 PGA204_C2.10 PGA204_C2.14 PGA204_C3.1 PGA204_C3.6 PGA204_C3.7 PGA204_C3.9 PGA204_C3.10 PGA204_C3.14 PGA204_C4.1 PGA204_C4.6 PGA204_C4.7 PGA204_C4.9 PGA204_C4.10 PGA204_C4.14 PGA204_C5.1 PGA204_C5.6 PGA204_C5.7 PGA204_C5.9 PGA204_C5.10 PGA204_C5.14 PGA204_C6.1 PGA204_C6.6 PGA204_C6.7 PGA204_C6.9 PGA204_C6.10 PGA204_C6.14 PGA204_C7.1 PGA204_C7.6 PGA204_C7.7 PGA204_C7.9 PGA204_C7.10 PGA204_C7.14 PGA204_C8.1 PGA204_C8.6 PGA204_C8.7 PGA204_C8.9 PGA204_C8.10 PGA204_C8.14 PGA204_C9.1 PGA204_C9.6 PGA204_C9.7 PGA204_C9.9 PGA204_C9.10 PGA204_C9.14 PGA204_C10.1 PGA204_C10.6 PGA204_C10.7 PGA204_C10.9 PGA204_C10.10 PGA204_C10.14 PGA204_C11.1 PGA204_C11.6 PGA204_C11.7 PGA204_C11.9 PGA204_C11.10 PGA204_C11.14 PGA204_C12.1 PGA204_C12.6 PGA204_C12.7 PGA204_C12.9 PGA204_C12.10 PGA204_C12.14 PGA204_C13.1 PGA204_C13.6 PGA204_C13.7 PGA204_C13.9 PGA204_C13.10 PGA204_C13.14 PGA204_C14.1 PGA204_C14.6 PGA204_C14.7 PGA204_C14.9 PGA204_C14.10 PGA204_C14.14 PGA204_C15.1 PGA204_C15.6 PGA204_C15.7 PGA204_C15.9 PGA204_C15.10 PGA204_C15.14 PGA204_C16.1 PGA204_C16.6 PGA204_C16.7 PGA204_C16.9 PGA204_C16.10 PGA204_C16.14 U1.3 U2.4 | length 9247.2
  Top Layer w10: H1_C1.0@1220.47,1472.44 1223.07,1475.04 1301.81,1475.04 1307.09,1480.31 PGA204_C1.1 ; H1_C9.0@1220.47,2527.56 1223.07,2530.16 1301.81,2530.16 1307.09,2535.43 PGA204_C9.1 ; H1_C13.0@1220.47,3055.12 1223.07,3057.72 1301.81,3057.72 1307.09,3062.99 PGA204_C13.1 ; H1_C5.0@1223.03,1999.61 1225.63,2002.2 1304.37,2002.2 1309.65,2007.48 PGA204_C5.1 ; PGA204_C1.6 PGA204_C1.7 1347.24,1200 1362.21,1185.04 C12_C1.0 ; PGA204_C9.6 PGA204_C9.7 1347.24,2255.12 1362.21,2240.16 C12_C9.0 ; PGA204_C13.6 PGA204_C13.7 1347.24,2782.68 1362.21,2767.72 C12_C13.0 ; PGA204_C5.6 PGA204_C5.7 1349.8,1727.17 1364.77,1712.2 C12_C5.0 ; PGA204_C1.9 PGA204_C1.10 ; PGA204_C1.14 1691.34,1400 C10_C1.0 C11_C1.0 ; PGA204_C9.9 PGA204_C9.10 ; PGA204_C9.14 1691.34,2455.12 C10_C9.0 C11_C9.0 ; PGA204_C13.9 PGA204_C13.10 ; PGA204_C13.14 1691.34,2982.68 C10_C13.0 C11_C13.0 ; PGA204_C5.9 PGA204_C5.10 ; PGA204_C5.14 1693.9,1927.17 C10_C5.0 C11_C5.0 ; H1_C2.0@1905.51,1472.44 1908.11,1475.04 1986.85,1475.04 1992.13,1480.31 PGA204_C2.1 ; H1_C6.0@1905.51,2000 1908.11,2002.6 1986.85,2002.6 1992.13,2007.87 PGA204_C6.1 ; H1_C10.0@1905.51,2527.56 1908.11,2530.16 1986.85,2530.16 1992.13,2535.43 PGA204_C10.1 ; H1_C14.0@1905.51,3055.12 1908.11,3057.72 1986.85,3057.72 1992.13,3062.99 PGA204_C14.1 ; PGA204_C2.6 PGA204_C2.7 2032.28,1200 2047.25,1185.04 C12_C2.0 ; PGA204_C6.6 PGA204_C6.7 2032.28,1727.56 2047.25,1712.6 C12_C6.0 ; PGA204_C10.6 PGA204_C10.7 2032.28,2255.12 2047.25,2240.16 C12_C10.0 ; PGA204_C14.6 PGA204_C14.7 2032.28,2782.68 2047.25,2767.72 C12_C14.0 ; PGA204_C2.9 PGA204_C2.10 ; PGA204_C2.14 2376.38,1400 C10_C2.0 C11_C2.0 ; PGA204_C6.9 PGA204_C6.10 ; PGA204_C6.14 2376.38,1927.56 C10_C6.0 C11_C6.0 ; PGA204_C10.9 PGA204_C10.10 ; PGA204_C10.14 2376.38,2455.12 C10_C10.0 C11_C10.0 ; PGA204_C14.9 PGA204_C14.10 ; PGA204_C14.14 2376.38,2982.68 C10_C14.0 C11_C14.0 ; H1_C3.0@2590.55,1472.44 2593.15,1475.04 2671.89,1475.04 2677.16,1480.31 PGA204_C3.1 ; H1_C7.0@2590.55,2000 2593.15,2002.6 2671.89,2002.6 2677.16,2007.87 PGA204_C7.1 ; H1_C11.0@2590.55,2527.56 2593.15,2530.16 2671.89,2530.16 2677.16,2535.43 PGA204_C11.1 ; H1_C15.0@2590.55,3055.12 2593.15,3057.72 2671.89,3057.72 2677.16,3062.99 PGA204_C15.1 ; PGA204_C3.6 PGA204_C3.7 2717.32,1200 2732.28,1185.04 C12_C3.0 ; PGA204_C7.6 PGA204_C7.7 2717.32,1727.56 2732.28,1712.6 C12_C7.0 ; PGA204_C11.6 PGA204_C11.7 2717.32,2255.12 2732.28,2240.16 C12_C11.0 ; PGA204_C15.6 PGA204_C15.7 2717.32,2782.68 2732.28,2767.72 C12_C15.0 ; C8.0 2937.01,3303.15 2925.2,3314.96 2925.2,3389.76 2937.01,3401.57 2976.38,3401.57 2972.44,3405.51 v1(2972.44,3456.69) ; PGA204_C3.9 PGA204_C3.10 ; PGA204_C3.14 3061.42,1400 C10_C3.0 C11_C3.0 ; PGA204_C7.9 PGA204_C7.10 ; PGA204_C7.14 3061.42,1927.56 C10_C7.0 C11_C7.0 ; PGA204_C11.9 PGA204_C11.10 ; PGA204_C11.14 3061.42,2455.12 C10_C11.0 C11_C11.0 ; PGA204_C15.9 PGA204_C15.10 ; PGA204_C15.14 3061.42,2982.68 C10_C15.0 C11_C15.0 ; v1(3153.54,3354.33) 3208.54,3354.33 3229.05,3374.84 3251.97,3374.84 ; U2.4 3251.97,3374.84 ; H1_C4.0@3275.59,1472.44 3278.19,1475.04 3356.93,1475.04 3362.2,1480.31 PGA204_C4.1 ; H1_C8.0@3275.59,2000 3278.19,2002.6 3356.93,2002.6 3362.2,2007.87 PGA204_C8.1 ; H1_C12.0@3275.59,2527.56 3278.19,2530.16 3356.93,2530.16 3362.2,2535.43 PGA204_C12.1 ; H1_C16.0@3275.59,3055.12 3278.19,3057.72 3356.93,3057.72 3362.2,3062.99 PGA204_C16.1 ; C9.0 3330.71,3334.65 3290.51,3374.84 3251.97,3374.84 ; PGA204_C4.6 PGA204_C4.7 3402.36,1200 3417.32,1185.04 C12_C4.0 ; PGA204_C8.6 PGA204_C8.7 3402.36,1727.56 3417.32,1712.6 C12_C8.0 ; PGA204_C12.6 PGA204_C12.7 3402.36,2255.12 3417.32,2240.16 C12_C12.0 ; PGA204_C16.6 PGA204_C16.7 3402.36,2782.68 3417.32,2767.72 C12_C16.0 ; C3.0 C4.0 3503.94,3267.72 3519.68,3251.97 U1.3 ; v1(3625.98,3185.04) U1.3 ; PGA204_C4.9 PGA204_C4.10 ; PGA204_C4.14 3746.46,1400 C10_C4.0 C11_C4.0 ; PGA204_C8.9 PGA204_C8.10 ; PGA204_C8.14 3746.46,1927.56 C10_C8.0 C11_C8.0 ; PGA204_C12.9 PGA204_C12.10 ; PGA204_C12.14 3746.46,2455.12 C10_C12.0 C11_C12.0 ; PGA204_C16.9 PGA204_C16.10 ; PGA204_C16.14 3746.46,2982.68 C10_C16.0 C11_C16.0 ; C5.0 C6.0 3740.16,3283.46 3740.16,3267.72 3724.41,3251.97 U1.3
MISO: 
MISO1: 
MOSI: 
MOSI1: 
NetC8_1: C8.1 U2.8 | length 82.7
  Top Layer w10: C8.1 U2.8
NetH1_C1_1: H1_C1.1 PGA204_C1.4 | length 95.9
  Top Layer w10: H1_C1.1@1220.47,1372.44 1242.91,1350 PGA204_C1.4
NetH1_C1_2: H1_C1.2 PGA204_C1.5 | length 98
  Top Layer w10: H1_C1.2@1220.47,1272.44 1248.03,1300 PGA204_C1.5
NetH1_C2_1: H1_C2.1 PGA204_C2.4 | length 95.9
  Top Layer w10: H1_C2.1@1905.51,1372.44 1927.95,1350 PGA204_C2.4
NetH1_C2_2: H1_C2.2 PGA204_C2.5 | length 98
  Top Layer w10: H1_C2.2@1905.51,1272.44 1933.07,1300 PGA204_C2.5
NetH1_C3_1: H1_C3.1 PGA204_C3.4 | length 95.9
  Top Layer w10: H1_C3.1@2590.55,1372.44 2612.99,1350 PGA204_C3.4
NetH1_C3_2: H1_C3.2 PGA204_C3.5 | length 98
  Top Layer w10: H1_C3.2@2590.55,1272.44 2618.11,1300 PGA204_C3.5
NetH1_C4_1: H1_C4.1 PGA204_C4.4 | length 95.9
  Top Layer w10: H1_C4.1@3275.59,1372.44 3298.03,1350 PGA204_C4.4
NetH1_C4_2: H1_C4.2 PGA204_C4.5 | length 98
  Top Layer w10: H1_C4.2@3275.59,1272.44 3303.15,1300 PGA204_C4.5
NetH1_C5_1: H1_C5.1 PGA204_C5.4 | length 95.9
  Top Layer w10: H1_C5.1@1223.03,1899.61 1245.47,1877.17 PGA204_C5.4
NetH1_C5_2: H1_C5.2 PGA204_C5.5 | length 98
  Top Layer w10: H1_C5.2@1223.03,1799.61 1250.59,1827.17 PGA204_C5.5
NetH1_C6_1: H1_C6.1 PGA204_C6.4 | length 95.9
  Top Layer w10: H1_C6.1@1905.51,1900 1927.95,1877.56 PGA204_C6.4
NetH1_C6_2: H1_C6.2 PGA204_C6.5 | length 98
  Top Layer w10: H1_C6.2@1905.51,1800 1933.07,1827.56 PGA204_C6.5
NetH1_C7_1: H1_C7.1 PGA204_C7.4 | length 95.9
  Top Layer w10: H1_C7.1@2590.55,1900 2612.99,1877.56 PGA204_C7.4
NetH1_C7_2: H1_C7.2 PGA204_C7.5 | length 98
  Top Layer w10: H1_C7.2@2590.55,1800 2618.11,1827.56 PGA204_C7.5
NetH1_C8_1: H1_C8.1 PGA204_C8.4 | length 95.9
  Top Layer w10: H1_C8.1@3275.59,1900 3298.03,1877.56 PGA204_C8.4
NetH1_C8_2: H1_C8.2 PGA204_C8.5 | length 98
  Top Layer w10: H1_C8.2@3275.59,1800 3303.15,1827.56 PGA204_C8.5
NetH1_C9_1: H1_C9.1 PGA204_C9.4 | length 95.9
  Top Layer w10: H1_C9.1@1220.47,2427.56 1242.91,2405.12 PGA204_C9.4
NetH1_C9_2: H1_C9.2 PGA204_C9.5 | length 98
  Top Layer w10: H1_C9.2@1220.47,2327.56 1248.03,2355.12 PGA204_C9.5
NetH1_C10_1: H1_C10.1 PGA204_C10.4 | length 95.9
  Top Layer w10: H1_C10.1@1905.51,2427.56 1927.95,2405.12 PGA204_C10.4
NetH1_C10_2: H1_C10.2 PGA204_C10.5 | length 98
  Top Layer w10: H1_C10.2@1905.51,2327.56 1933.07,2355.12 PGA204_C10.5
NetH1_C11_1: H1_C11.1 PGA204_C11.4 | length 95.9
  Top Layer w10: H1_C11.1@2590.55,2427.56 2612.99,2405.12 PGA204_C11.4
NetH1_C11_2: H1_C11.2 PGA204_C11.5 | length 98
  Top Layer w10: H1_C11.2@2590.55,2327.56 2618.11,2355.12 PGA204_C11.5
NetH1_C12_1: H1_C12.1 PGA204_C12.4 | length 95.9
  Top Layer w10: H1_C12.1@3275.59,2427.56 3298.03,2405.12 PGA204_C12.4
NetH1_C12_2: H1_C12.2 PGA204_C12.5 | length 98
  Top Layer w10: H1_C12.2@3275.59,2327.56 3303.15,2355.12 PGA204_C12.5
NetH1_C13_1: H1_C13.1 PGA204_C13.4 | length 95.9
  Top Layer w10: H1_C13.1@1220.47,2955.12 1242.91,2932.68 PGA204_C13.4
NetH1_C13_2: H1_C13.2 PGA204_C13.5 | length 98
  Top Layer w10: H1_C13.2@1220.47,2855.12 1248.03,2882.68 PGA204_C13.5
NetH1_C14_1: H1_C14.1 PGA204_C14.4 | length 95.9
  Top Layer w10: H1_C14.1@1905.51,2955.12 1927.95,2932.68 PGA204_C14.4
NetH1_C14_2: H1_C14.2 PGA204_C14.5 | length 98
  Top Layer w10: H1_C14.2@1905.51,2855.12 1933.07,2882.68 PGA204_C14.5
NetH1_C15_1: H1_C15.1 PGA204_C15.4 | length 95.9
  Top Layer w10: H1_C15.1@2590.55,2955.12 2612.99,2932.68 PGA204_C15.4
NetH1_C15_2: H1_C15.2 PGA204_C15.5 | length 98
  Top Layer w10: H1_C15.2@2590.55,2855.12 2618.11,2882.68 PGA204_C15.5
NetH1_C16_1: H1_C16.1 PGA204_C16.4 | length 95.9
  Top Layer w10: H1_C16.1@3275.59,2955.12 3298.03,2932.68 PGA204_C16.4
NetH1_C16_2: H1_C16.2 PGA204_C16.5 | length 98
  Top Layer w10: H1_C16.2@3275.59,2855.12 3303.15,2882.68 PGA204_C16.5
NetPGA204_C1_11: PGA204_C1.11 PGA204_C1.12 R2_C1.1 | length 132.1
  Top Layer w10: PGA204_C1.12 PGA204_C1.11 1706.69,1250 R2_C1.1
NetPGA204_C2_11: PGA204_C2.11 PGA204_C2.12 R2_C2.1 | length 132.1
  Top Layer w10: PGA204_C2.12 PGA204_C2.11 2391.73,1250 R2_C2.1
NetPGA204_C3_11: PGA204_C3.11 PGA204_C3.12 R2_C3.1 | length 132.1
  Top Layer w10: PGA204_C3.12 PGA204_C3.11 3076.77,1250 R2_C3.1
NetPGA204_C4_11: PGA204_C4.11 PGA204_C4.12 R2_C4.1 | length 132.1
  Top Layer w10: PGA204_C4.12 PGA204_C4.11 3761.81,1250 R2_C4.1
NetPGA204_C5_11: PGA204_C5.11 PGA204_C5.12 R2_C5.1 | length 132.1
  Top Layer w10: PGA204_C5.12 PGA204_C5.11 1709.25,1777.17 R2_C5.1
NetPGA204_C6_11: PGA204_C6.11 PGA204_C6.12 R2_C6.1 | length 132.1
  Top Layer w10: PGA204_C6.12 PGA204_C6.11 2391.73,1777.56 R2_C6.1
NetPGA204_C7_11: PGA204_C7.11 PGA204_C7.12 R2_C7.1 | length 132.1
  Top Layer w10: PGA204_C7.12 PGA204_C7.11 3076.77,1777.56 R2_C7.1
NetPGA204_C8_11: PGA204_C8.11 PGA204_C8.12 R2_C8.1 | length 132.1
  Top Layer w10: PGA204_C8.12 PGA204_C8.11 3761.81,1777.56 R2_C8.1
NetPGA204_C9_11: PGA204_C9.11 PGA204_C9.12 R2_C9.1 | length 132.1
  Top Layer w10: PGA204_C9.12 PGA204_C9.11 1706.69,2305.12 R2_C9.1
NetPGA204_C10_11: PGA204_C10.11 PGA204_C10.12 R2_C10.1 | length 132.1
  Top Layer w10: PGA204_C10.12 PGA204_C10.11 2391.73,2305.12 R2_C10.1
NetPGA204_C11_11: PGA204_C11.11 PGA204_C11.12 R2_C11.1 | length 132.1
  Top Layer w10: PGA204_C11.12 PGA204_C11.11 3076.77,2305.12 R2_C11.1
NetPGA204_C12_11: PGA204_C12.11 PGA204_C12.12 R2_C12.1 | length 132.1
  Top Layer w10: PGA204_C12.12 PGA204_C12.11 3761.81,2305.12 R2_C12.1
NetPGA204_C13_11: PGA204_C13.11 PGA204_C13.12 R2_C13.1 | length 132.1
  Top Layer w10: PGA204_C13.12 PGA204_C13.11 1706.69,2832.68 R2_C13.1
NetPGA204_C14_11: PGA204_C14.11 PGA204_C14.12 R2_C14.1 | length 132.1
  Top Layer w10: PGA204_C14.12 PGA204_C14.11 2391.73,2832.68 R2_C14.1
NetPGA204_C15_11: PGA204_C15.11 PGA204_C15.12 R2_C15.1 | length 132.1
  Top Layer w10: PGA204_C15.12 PGA204_C15.11 3076.77,2832.68 R2_C15.1
NetPGA204_C16_11: PGA204_C16.11 PGA204_C16.12 R2_C16.1 | length 132.1
  Top Layer w10: PGA204_C16.12 PGA204_C16.11 3761.81,2832.68 R2_C16.1
POWER: 
"PRESSURE 1": C11_C1.1 P1.1 R2_C1.0 | length 2722.1
  Top Layer w10: v1(1708.66,1090.55) R2_C1.0 1708.66,1200.79 1767.72,1259.84 C11_C1.1
  Bottom Layer w10: P1.1 1413.39,3354.33 1413.39,1385.83 v1(1708.66,1090.55)
"PRESSURE 2": C11_C2.1 P1.10 R2_C2.0 | length 2707.6
  Top Layer w10: v1(2393.7,1090.55) R2_C2.0 2393.7,1200.79 2452.76,1259.84 C11_C2.1
  Bottom Layer w10: P1.10 2011.81,3134.65 2011.81,1472.44 v1(2393.7,1090.55)
"PRESSURE 3": C11_C3.1 P1.20 R2_C3.0 | length 2764.3
  Top Layer w10: R2_C3.0 3078.74,1200.79 3137.79,1259.84 C11_C3.1
  Bottom Layer w10: P1.20 2369.85,3293.7 2471.68,3191.87 2548.28,3191.87 2791.02,2949.13 2791.02,1378.27 v1(3078.74,1090.55)
"PRESSURE 4": C11_C4.1 P1.24 R2_C4.0 | length 3335.7
  Top Layer w10: v1(3763.78,1090.55) R2_C4.0 3763.78,1200.79 3822.83,1259.84 C11_C4.1
  Bottom Layer w10: P1.24 2563.84,3293.7 2739.43,3118.11 3326.77,3118.11 3354.33,3090.55 3354.33,1500 v1(3763.78,1090.55)
"PRESSURE 5": C11_C5.1 P1.2 R2_C5.0 | length 2063.4
  Top Layer w10: v1(1711.22,1617.72) R2_C5.0 1711.22,1727.95 1770.28,1787.01 C11_C5.1
  Bottom Layer w10: P1.2 1452.76,1876.18 v1(1711.22,1617.72)
"PRESSURE 6": C11_C6.1 P1.12 R2_C6.0 | length 2063.8
  Top Layer w10: R2_C6.0 2393.7,1728.35 2452.76,1787.4 C11_C6.1
  Bottom Layer w10: P1.12 2032.76,3213.7 2032.76,1979.06 v1(2393.7,1618.11)
"PRESSURE 7": C11_C7.1 P1.19 R2_C7.0 | length 2327.8
  Top Layer w10: R2_C7.0 3078.74,1728.35 3137.79,1787.4 C11_C7.1
  Bottom Layer w10: P1.19 2414.13,3332.32 2414.13,3277.7 2479.96,3211.87 2558.33,3211.87 2811.02,2959.18 2811.02,1885.83 v1(3078.74,1618.11)
"PRESSURE 8": C11_C8.1 P1.23 R2_C8.0 | length 2826.8
  Top Layer w10: R2_C8.0 3763.78,1728.35 3822.83,1787.4 C11_C8.1
  Bottom Layer w10: P1.23 2602.36,3344.09 2602.36,3283.46 2747.72,3138.11 3335.06,3138.11 3374.33,3098.84 3374.33,2007.56 v1(3763.78,1618.11)
"PRESSURE 9": C11_C9.1 P1.3 R2_C9.0 | length 1572.7
  Top Layer w10: R2_C9.0 1708.66,2255.91 1767.72,2314.96 C11_C9.1
  Bottom Layer w10: P1.3 1491.38,3332.32 1491.38,2953.46 1487.56,2949.64 1487.56,2915.87 1488.19,2915.24 1488.19,2422.71 1487.56,2422.08 1487.56,2366.77 v1(1708.66,2145.67)
"PRESSURE 10": C11_C10.1 P1.14 R2_C10.0 | length 1569.6
  Top Layer w10: v1(2393.7,2145.67) R2_C10.0 2393.7,2255.91 2452.76,2314.96 C11_C10.1
  Bottom Layer w10: P1.14 2052.76,2486.61 v1(2393.7,2145.67)
"PRESSURE 11": C11_C11.1 P1.22 R2_C11.0 | length 1718.2
  Top Layer w10: v1(3078.74,2145.67) R2_C11.0 3078.74,2255.91 3137.79,2314.96 C11_C11.1
  Bottom Layer w10: P1.22 2514.54,3231.92 2566.57,3231.92 2834.65,2963.84 2834.65,2389.76 v1(3078.74,2145.67)
"PRESSURE 12": C11_C12.1 P1.26 R2_C12.0 | length 2213.7
  Top Layer w10: v1(3763.78,2145.67) R2_C12.0 3763.78,2255.91 3822.83,2314.96 C11_C12.1
  Bottom Layer w10: P1.26 2788.35,3158.11 3343.34,3158.11 3394.33,3107.12 3394.33,2515.12 v1(3763.78,2145.67)
"PRESSURE 13": C11_C13.1 P1.4 R2_C13.0 | length 890.6
  Top Layer w10: R2_C13.0 1708.66,2783.47 1767.72,2842.52 C11_C13.1
  Bottom Layer w10: P1.4 1552.76,2979.25 1567.56,2964.44 1567.56,2814.33 v1(1708.66,2673.23)
"PRESSURE 14": C11_C14.1 P1.16 R2_C14.0 | length 1000.6
  Top Layer w10: v1(2393.7,2673.23) R2_C14.0 2393.7,2783.47 2452.76,2842.52 C11_C14.1
  Bottom Layer w10: P1.16 2152.76,2914.17 v1(2393.7,2673.23)
"PRESSURE 15": C11_C15.1 P1.21 R2_C15.0 | length 1280.6
  Top Layer w10: v1(3078.74,2673.23) R2_C15.0 3078.74,2783.47 3137.79,2842.52 C11_C15.1
  Bottom Layer w10: P1.21 2514.13,3332.32 2514.13,3277.7 2537.38,3254.46 2572.32,3254.46 2857.64,2969.13 2857.64,2894.33 v1(3078.74,2673.23)
"PRESSURE 16": C11_C16.1 P1.25 R2_C16.0 | length 1744.1
  Top Layer w10: v1(3763.78,2673.23) R2_C16.0 3763.78,2783.47 3822.83,2842.52 C11_C16.1
  Bottom Layer w10: P1.25 2868.35,3178.11 3351.62,3178.11 3414.33,3115.4 3414.33,3022.68 v1(3763.78,2673.23)
SCLK: 
SCLK1: 
STUB1: H1.3 RB.1 T1.1 | length 377.9
  Top Layer w10: H1.3 4437.01,3578.75 4523.31,3578.75 4543.19,3558.86 RB.1 ; RB.1@4547.13,3452.76 4547.24,3452.64 T1.1
STUB2: H1.1 R1.1 T1.2 | length 306.1
  Top Layer w10: H1.1 4589.76,3488.98 4606.3,3472.45 T1.2 4606.42,3315.08 R1.1
STUB3: H1.2 RB.0 RT.1 T1.0 | length 322.8
  Top Layer w10: RT.1 T1.0@4488.07,3315.08 ; T1.0@4488.07,3315.08 T1.0 ; T1.0@4488.07,3315.08 T1.0 ; T1.0@4488.07,3315.08 T1.0 ; T1.0@4488.07,3315.08 T1.0 ; T1.0 RB.0 H1.2@4488.19,3529.93 ; H1.2@4488.19,3529.93 H1.2 ; H1.2@4488.19,3529.93 H1.2 ; H1.2@4488.19,3529.93 H1.2 ; H1.2@4488.19,3529.93 H1.2
STUB4: H1.0 R1.0 RT.0
"VCC IR": 
"VCC RED": 
VCC+: C1.1 C2.1 C5.1 C6.1 C10_C1.1 C10_C2.1 C10_C3.1 C10_C4.1 C10_C5.1 C10_C6.1 C10_C7.1 C10_C8.1 C10_C9.1 C10_C10.1 C10_C11.1 C10_C12.1 C10_C13.1 C10_C14.1 C10_C15.1 C10_C16.1 P1.8 PGA204_C1.13 PGA204_C2.13 PGA204_C3.13 PGA204_C4.13 PGA204_C5.13 PGA204_C6.13 PGA204_C7.13 PGA204_C8.13 PGA204_C9.13 PGA204_C10.13 PGA204_C11.13 PGA204_C12.13 PGA204_C13.13 PGA204_C14.13 PGA204_C15.13 PGA204_C16.13 U1.1 | length 3078.1
  Top Layer w10: v1(1527.56,1350.39) 1626.97,1350.39 PGA204_C1.13 1689.37,1350 C10_C1.1 ; v1(1527.56,2405.51) 1626.97,2405.51 PGA204_C9.13 1689.37,2405.12 C10_C9.1 ; v1(1527.56,2933.07) 1626.97,2933.07 PGA204_C13.13 1689.37,2932.68 C10_C13.1 ; v1(1530.12,1877.56) 1629.53,1877.56 PGA204_C5.13 1691.93,1877.17 C10_C5.1 ; v1(2212.6,1350.39) 2312.01,1350.39 PGA204_C2.13 2374.41,1350 C10_C2.1 ; v1(2212.6,1877.95) 2312.01,1877.95 PGA204_C6.13 2374.41,1877.56 C10_C6.1 ; v1(2212.6,2405.51) 2312.01,2405.51 PGA204_C10.13 2374.41,2405.12 C10_C10.1 ; v1(2212.6,2933.07) 2312.01,2933.07 PGA204_C14.13 2374.41,2932.68 C10_C14.1 ; v1(2897.64,1350.39) 2997.05,1350.39 PGA204_C3.13 3059.45,1350 C10_C3.1 ; v1(2897.64,1877.95) 2997.05,1877.95 PGA204_C7.13 3059.45,1877.56 C10_C7.1 ; v1(2897.64,2405.51) 2997.05,2405.51 PGA204_C11.13 3059.45,2405.12 C10_C11.1 ; v1(2897.64,2933.07) 2997.05,2933.07 PGA204_C15.13 3059.45,2932.68 C10_C15.1 ; v1(3582.68,1350.39) 3682.09,1350.39 PGA204_C4.13 3744.49,1350 C10_C4.1 ; v1(3582.68,1877.95) 3682.09,1877.95 PGA204_C8.13 3744.49,1877.56 C10_C8.1 ; v1(3582.68,2405.51) 3682.09,2405.51 PGA204_C12.13 3744.49,2405.12 C10_C12.1 ; v1(3582.68,2933.07) 3682.09,2933.07 PGA204_C16.13 3744.49,2932.68 C10_C16.1 ; C2.1 3653.54,3421.26 C1.1 v1(3744.09,3417.32) C6.1 ; U1.1@3666.14,3342.52 C6.1 ; C5.1 C6.1
VCC-: C7.1 C12_C1.1 C12_C2.1 C12_C3.1 C12_C4.1 C12_C5.1 C12_C6.1 C12_C7.1 C12_C8.1 C12_C9.1 C12_C10.1 C12_C11.1 C12_C12.1 C12_C13.1 C12_C14.1 C12_C15.1 C12_C16.1 P1.7 PGA204_C1.8 PGA204_C2.8 PGA204_C3.8 PGA204_C4.8 PGA204_C5.8 PGA204_C6.8 PGA204_C7.8 PGA204_C8.8 PGA204_C9.8 PGA204_C10.8 PGA204_C11.8 PGA204_C12.8 PGA204_C13.8 PGA204_C14.8 PGA204_C15.8 PGA204_C16.8 U2.2 U2.3 U2.6 U2.7 | length 2379.1
  Top Layer w10: v1(1251.97,1082.68) C12_C1.1 PGA204_C1.8 ; v1(1251.97,2137.8) C12_C9.1 PGA204_C9.8 ; v1(1251.97,2665.35) C12_C13.1 PGA204_C13.8 ; v1(1254.53,1609.84) C12_C5.1 PGA204_C5.8 ; v1(1937.01,1082.68) C12_C2.1 PGA204_C2.8 ; v1(1937.01,1610.24) C12_C6.1 PGA204_C6.8 ; v1(1937.01,2137.8) C12_C10.1 PGA204_C10.8 ; v1(1937.01,2665.35) C12_C14.1 PGA204_C14.8 ; v1(2622.05,1082.68) C12_C3.1 PGA204_C3.8 ; v1(2622.05,1610.24) C12_C7.1 PGA204_C7.8 ; v1(2622.05,2137.8) C12_C11.1 PGA204_C11.8 ; v1(2622.05,2665.35) C12_C15.1 PGA204_C15.8 ; C7.1@2974.02,3348.03 U2.6 U2.7 3153.54,3298.03 ; v1(3153.54,3255.91) 3153.54,3298.03 ; U2.3 U2.2 3153.54,3298.03 ; v1(3307.09,1082.68) C12_C4.1 PGA204_C4.8 ; v1(3307.09,1610.24) C12_C8.1 PGA204_C8.8 ; v1(3307.09,2137.8) C12_C12.1 PGA204_C12.8 ; v1(3307.09,2665.35) C12_C16.1 PGA204_C16.8
VEXCITE: H1_C1.3 H1_C2.3 H1_C3.3 H1_C4.3 H1_C5.3 H1_C6.3 H1_C7.3 H1_C8.3 H1_C9.3 H1_C10.3 H1_C11.3 H1_C12.3 H1_C13.3 H1_C14.3 H1_C15.3 H1_C16.3 M1.2 M2.2 P1.13 | length 226
  Top Layer w10: M2.2 3208.66,3452.76 3216.57,3444.84 3322.8,3444.84 3330.71,3452.76 ; M1.2 3330.71,3452.76 ; v1(3374.02,3417.32) 3366.14,3417.32 3330.71,3452.76
pads on no net: PGA204_C1.2 PGA204_C1.3 PGA204_C2.2 PGA204_C2.3 PGA204_C3.2 PGA204_C3.3 PGA204_C4.2 PGA204_C4.3 PGA204_C5.2 PGA204_C5.3 PGA204_C6.2 PGA204_C6.3 PGA204_C7.2 PGA204_C7.3 PGA204_C8.2 PGA204_C8.3 PGA204_C9.2 PGA204_C9.3 PGA204_C10.2 PGA204_C10.3 PGA204_C11.2 PGA204_C11.3 PGA204_C12.2 PGA204_C12.3 PGA204_C13.2 PGA204_C13.3 PGA204_C14.2 PGA204_C14.3 PGA204_C15.2 PGA204_C15.3 PGA204_C16.2 PGA204_C16.3 T1.5

## Polygon pours and split planes (outlines as drawn)
STUB4 on Top Layer "GND-No Net" (solid, pour order 255): 4322.83,3602.37 4759.84,3602.37 4759.84,2968.51 4322.83,2968.51
GND on Top Layer "GND-No Net" (solid, pour order 194): 1122.05,3625.98 4216.54,3625.98 4216.54,1003.94 1122.05,1003.94
STUB4 on Bottom Layer "GND-No Net" (solid, pour order 336): 4322.83,3602.37 4759.84,3602.37 4759.84,2968.51 4322.83,2968.51
GND on Bottom Layer "GND-No Net" (solid, pour order 198): 1122.05,3625.98 4216.54,3625.98 4216.54,1003.94 1122.05,1003.94
GND on GND (split plane): 4754.74,2973.61 4327.93,2973.61 4327.93,3597.27 4754.74,3597.27
GND on GND (split plane): 4211.44,1009.03 1127.15,1009.03 1127.15,3620.89 4211.44,3620.89
STUB4 on GND (split plane): 4822.42,984.66 1102.77,984.66 1102.77,3818.49 4822.42,3818.49
"VCC IR" on VCC+ (split plane): 4754.74,2973.61 4327.93,2973.61 4327.93,3597.27 4754.74,3597.27
VCC+ on VCC+ (split plane): 4211.44,1009.03 1127.15,1009.03 1127.15,3620.89 4211.44,3620.89
STUB4 on VCC+ (split plane): 4822.42,984.66 1102.77,984.66 1102.77,3818.49 4822.42,3818.49
"VCC RED" on VCC- (split plane): 4754.74,2973.61 4327.93,2973.61 4327.93,3597.27 4754.74,3597.27
VCC- on VCC- (split plane): 4211.44,1009.03 1127.15,1009.03 1127.15,3620.89 4211.44,3620.89
STUB4 on VCC- (split plane): 4822.42,984.66 1102.77,984.66 1102.77,3818.49 4822.42,3818.49
VEXCITE on VExcite (split plane): 4754.74,2973.61 4327.93,2973.61 4327.93,3597.27 4754.74,3597.27
VEXCITE on VExcite (split plane): 4211.44,1009.03 1127.15,1009.03 1127.15,3620.89 4211.44,3620.89
STUB4 on VExcite (split plane): 4822.42,984.66 1102.77,984.66 1102.77,3818.49 4822.42,3818.49

## Keep-outs
Keep-Out Layer:
  lines w10: 1082.68,11318.9 10019.68,11318.9 ; 1082.68,964.57 1082.68,3838.58 4842.52,3838.58 4842.52,3681.1 4842.52,964.57 1082.68,964.57 ; 1122.05,1003.94 1122.05,3625.98 4216.54,3625.98 4216.54,1003.94 1122.05,1003.94 ; 4322.83,2968.51 4759.84,2968.51 4759.84,3602.37 4322.83,3602.37 4322.83,2968.51

## Other copper
VCC+ (plane layer: these items are gaps in the copper):
  lines w10: 1122.05,1003.94 4216.54,1003.94 4216.54,3625.98 1122.05,3625.98 1122.05,1003.94 ; 4322.83,2968.51 4759.84,2968.51 4759.84,3602.37 4322.83,3602.37 4322.83,2968.51
GND (plane layer: these items are gaps in the copper):
  lines w10: 1122.05,1003.94 4216.54,1003.94 4216.54,3625.98 1122.05,3625.98 1122.05,1003.94 ; 4322.83,2968.51 4322.83,3602.37 4759.84,3602.37 4759.84,2968.51 4322.83,2968.51
VCC- (plane layer: these items are gaps in the copper):
  lines w10: 1122.05,1003.94 4216.54,1003.94 4216.54,3625.98 1122.05,3625.98 1122.05,1003.94 ; 4322.83,2968.51 4759.84,2968.51 4759.84,3602.37 4322.83,3602.37 4322.83,2968.51
VExcite (plane layer: these items are gaps in the copper):
  lines w10: 1122.05,1003.94 4216.54,1003.94 4216.54,3625.98 1122.05,3625.98 1122.05,1003.94 ; 4322.83,2968.51 4759.84,2968.51 4759.84,3602.37 4322.83,3602.37 4322.83,2968.51

## Silkscreen, mask and mechanical layers (free items; w line width, h text height)
Top Overlay:
  drawing of 415 lines, arcs and shapes, not listed
  text "Ian Glass" at 1185.04,3696.85 h60
  text "R" at 4354.33,3133.86 h100
  text "N" at 4669.29,3133.86 h100